# Altium PCB PCB03.PcbDoc
Units mm, origin at the board's own origin, x right, y up, seen from the top; angles counter-clockwise.
Board outline 100 x 100 mm, 4 copper layers (L1, L2, L3, L4), stack 1.571 mm thick; 160 components, 50 nets, 320 pads, 486 vias.
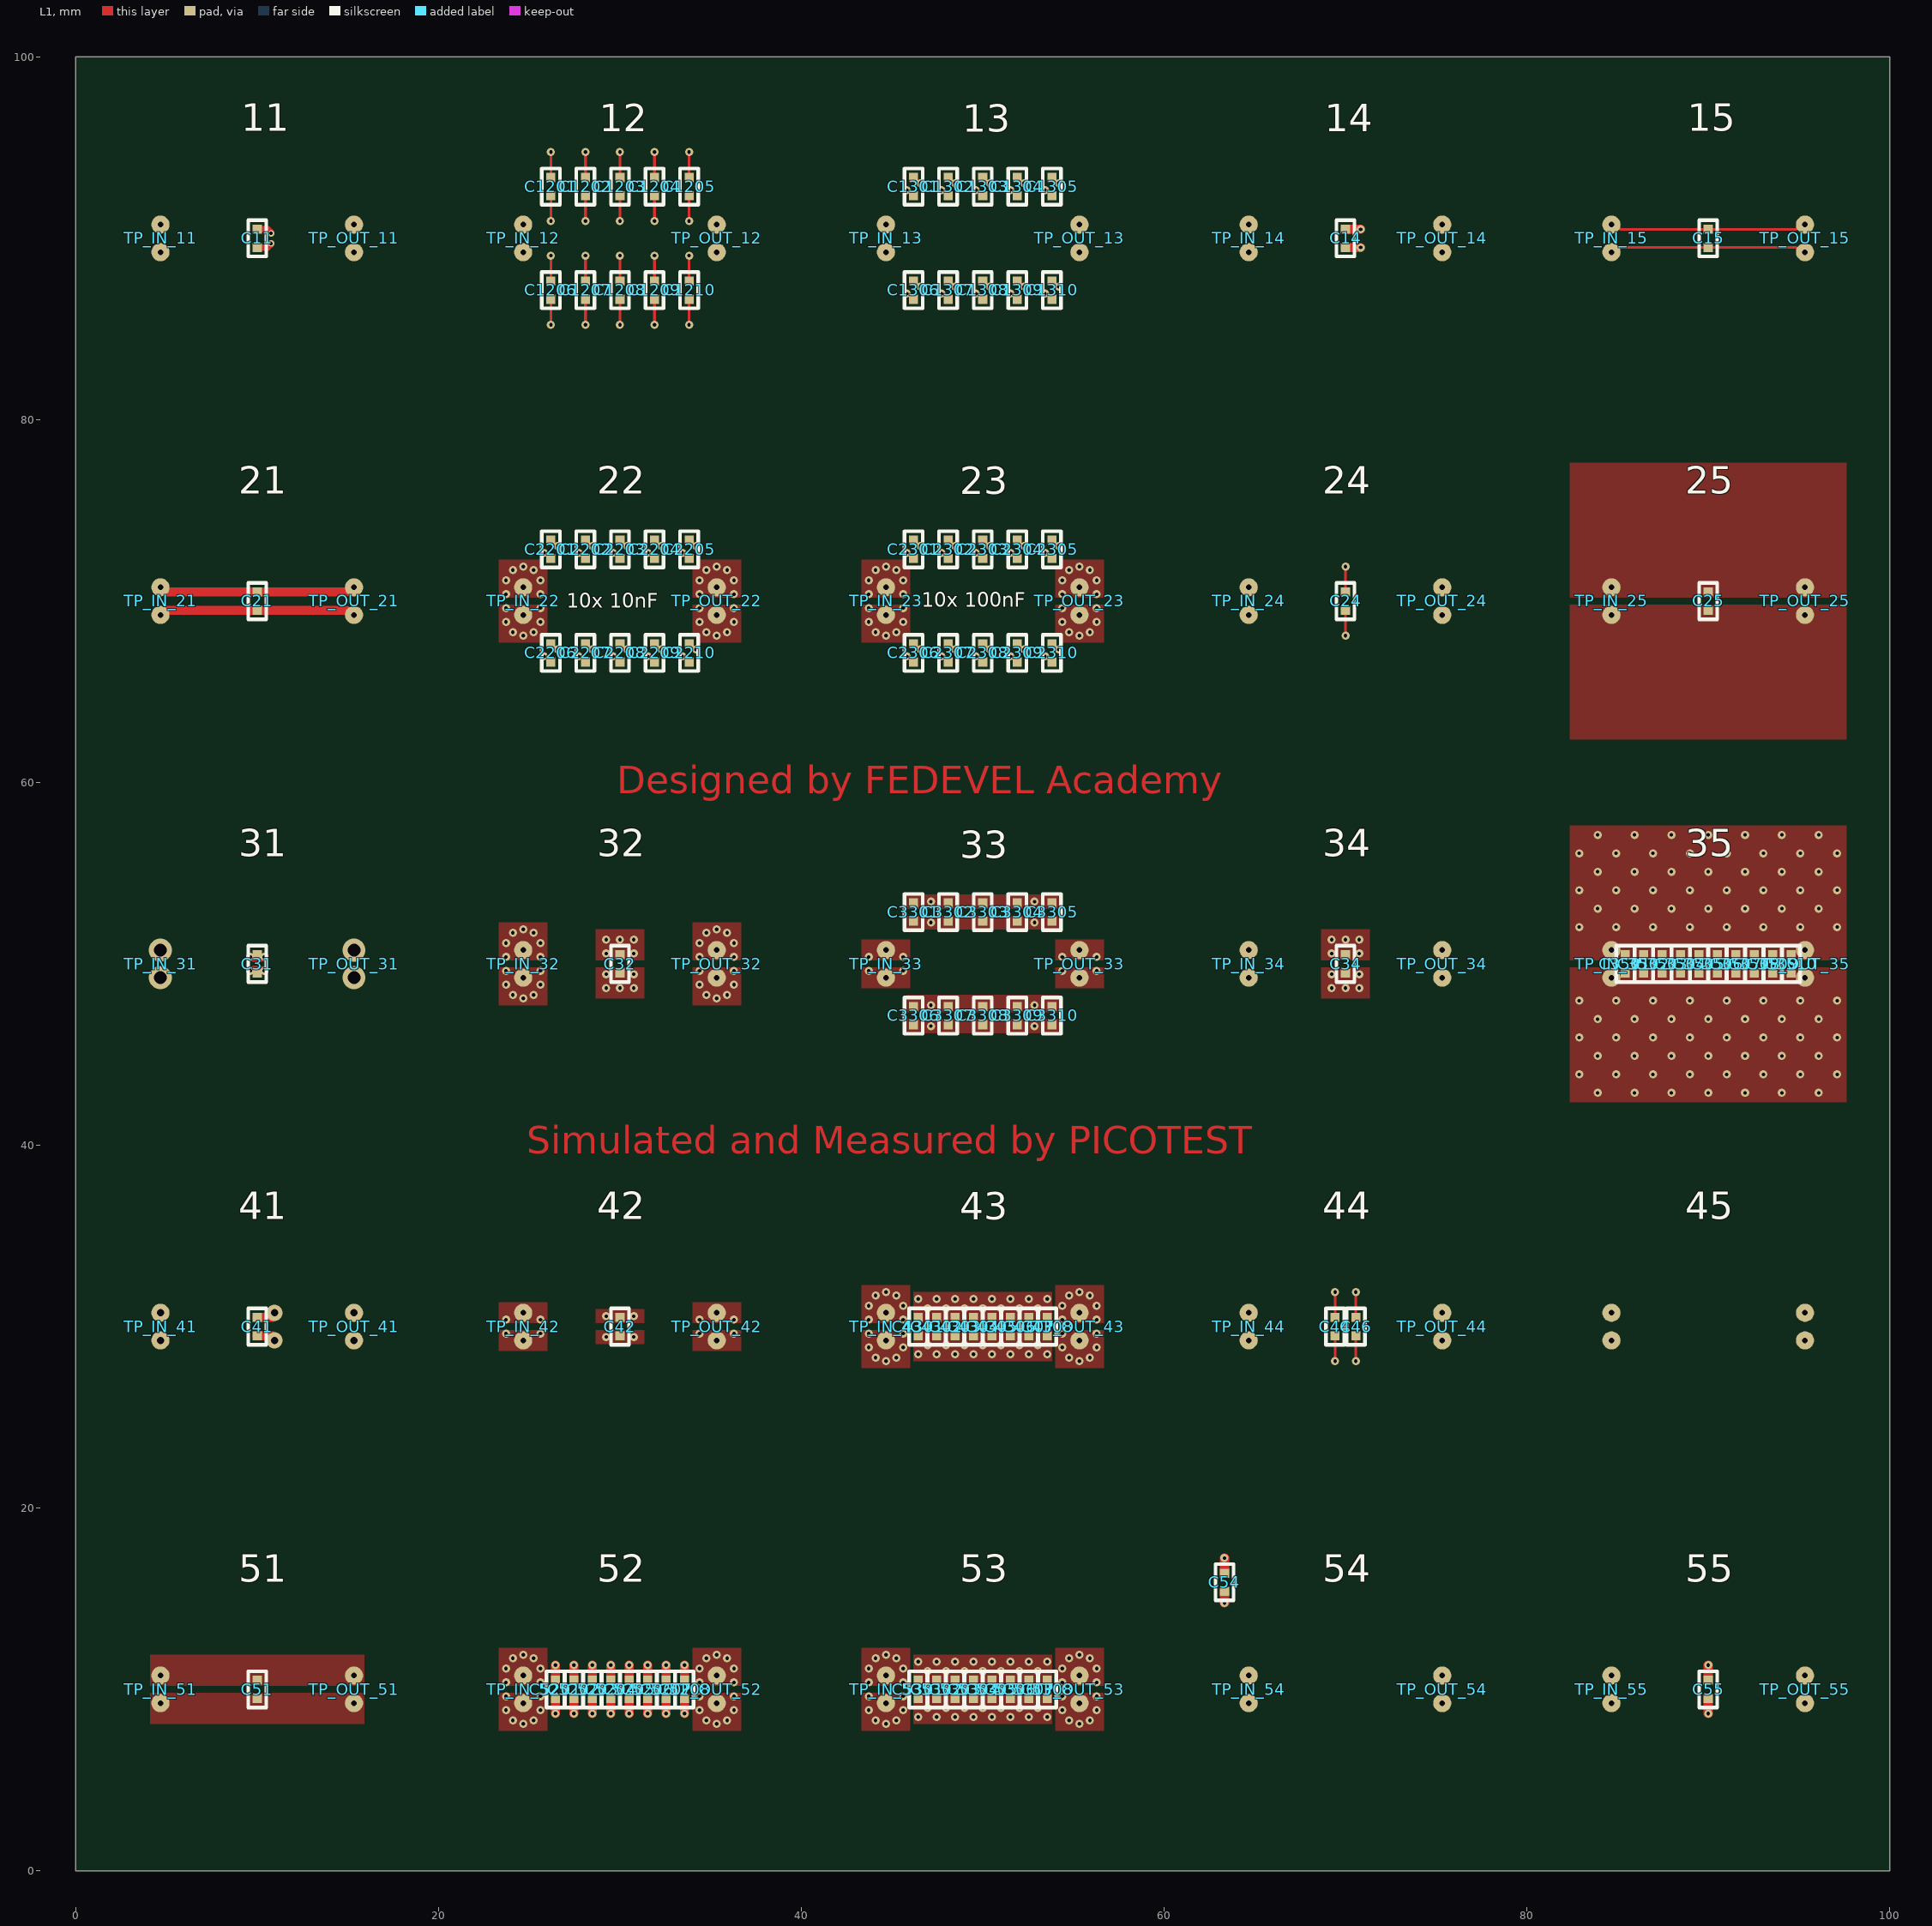
[diagram p0: L1 view]
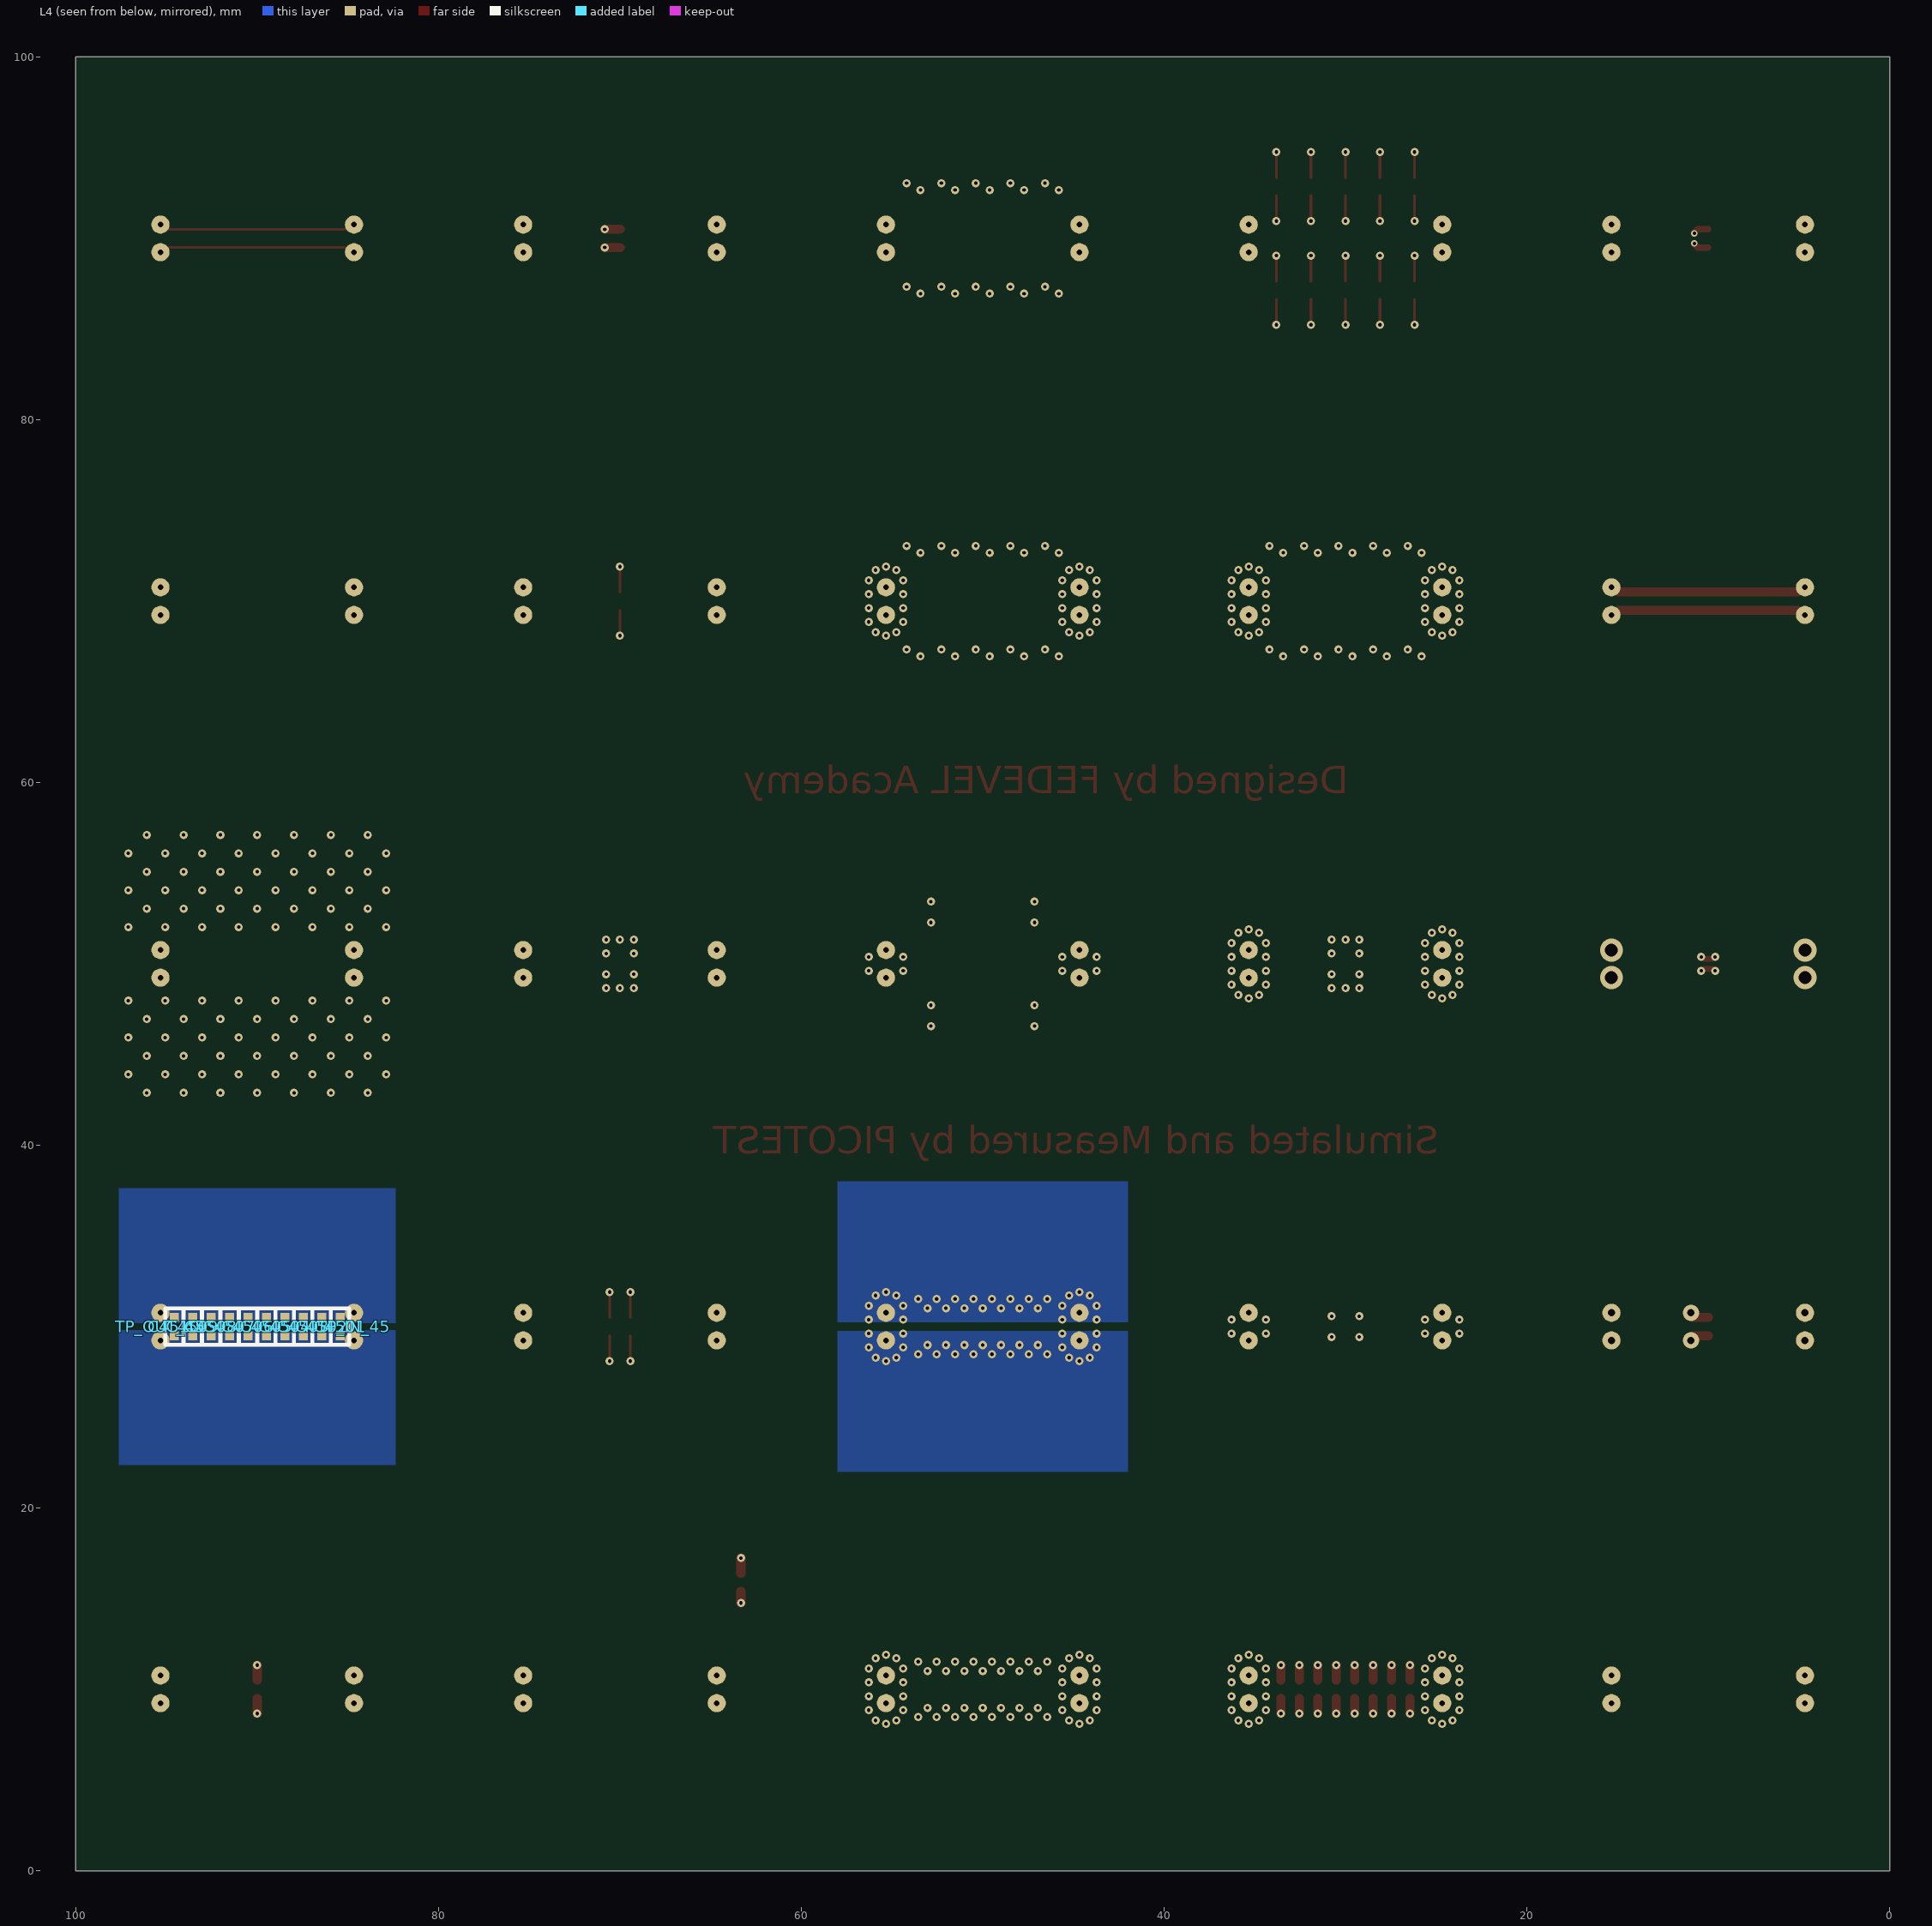
[diagram p1: L4 view, seen from below]
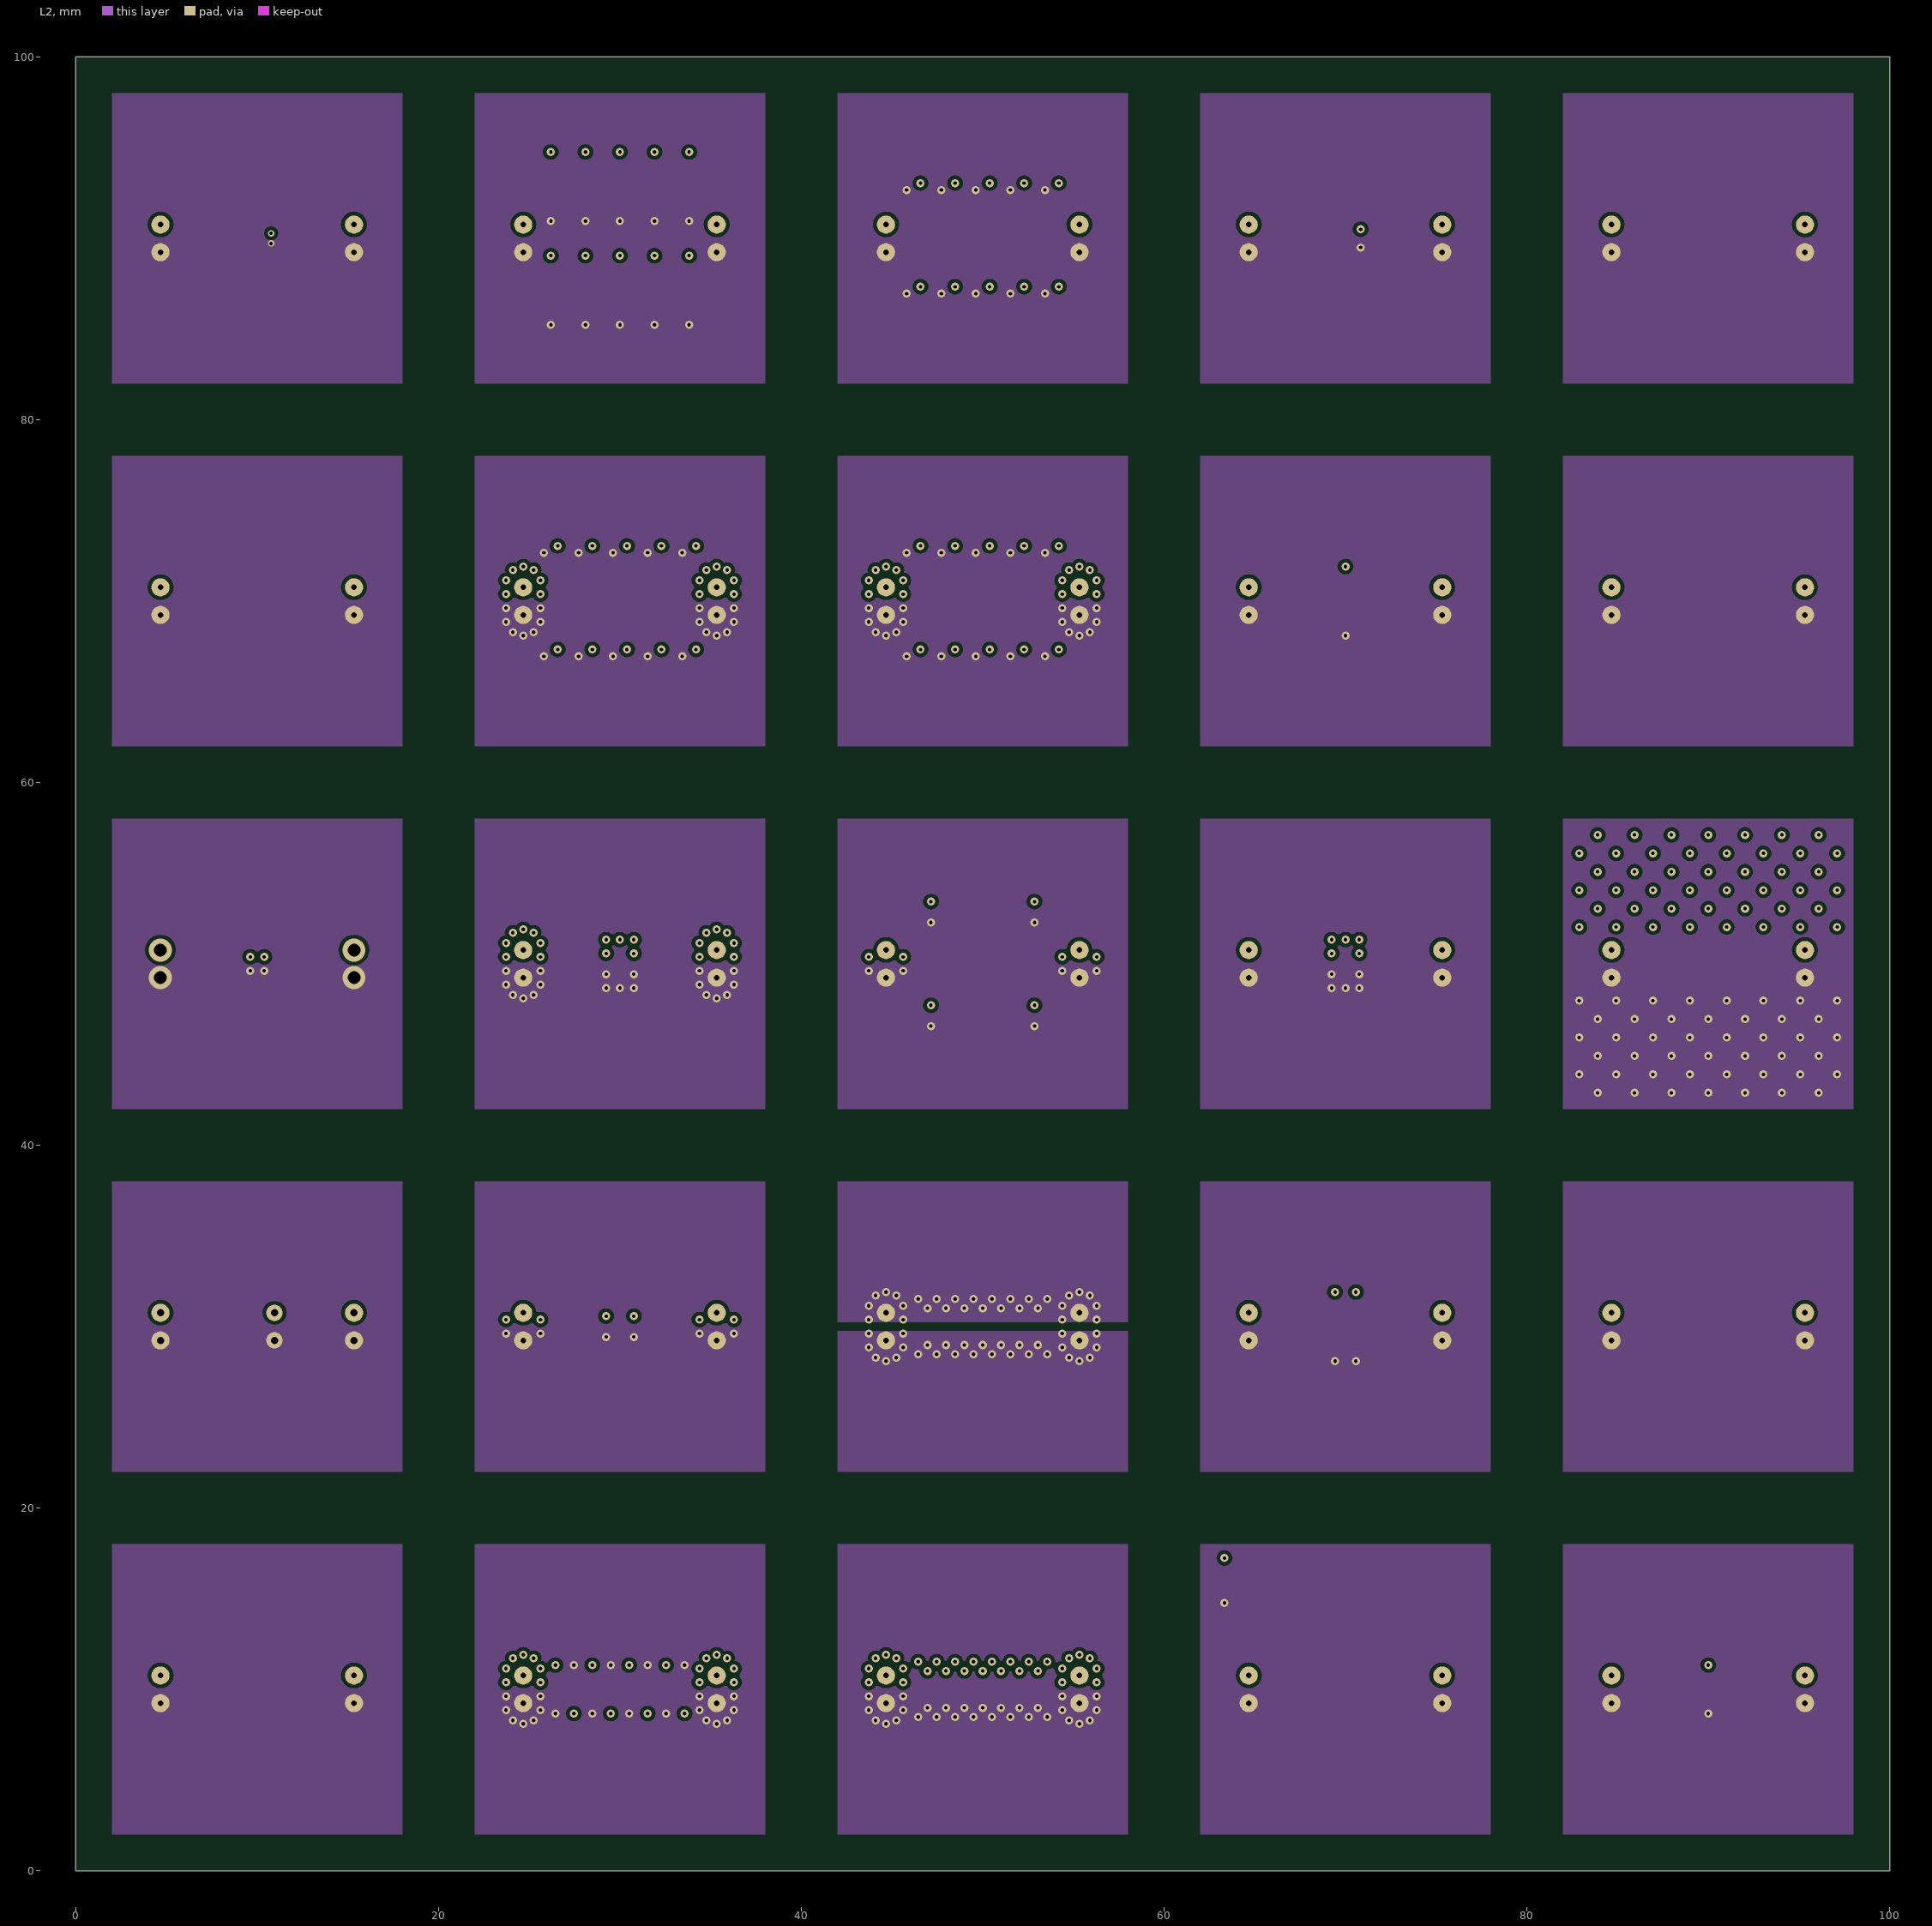
[diagram p2: L2]
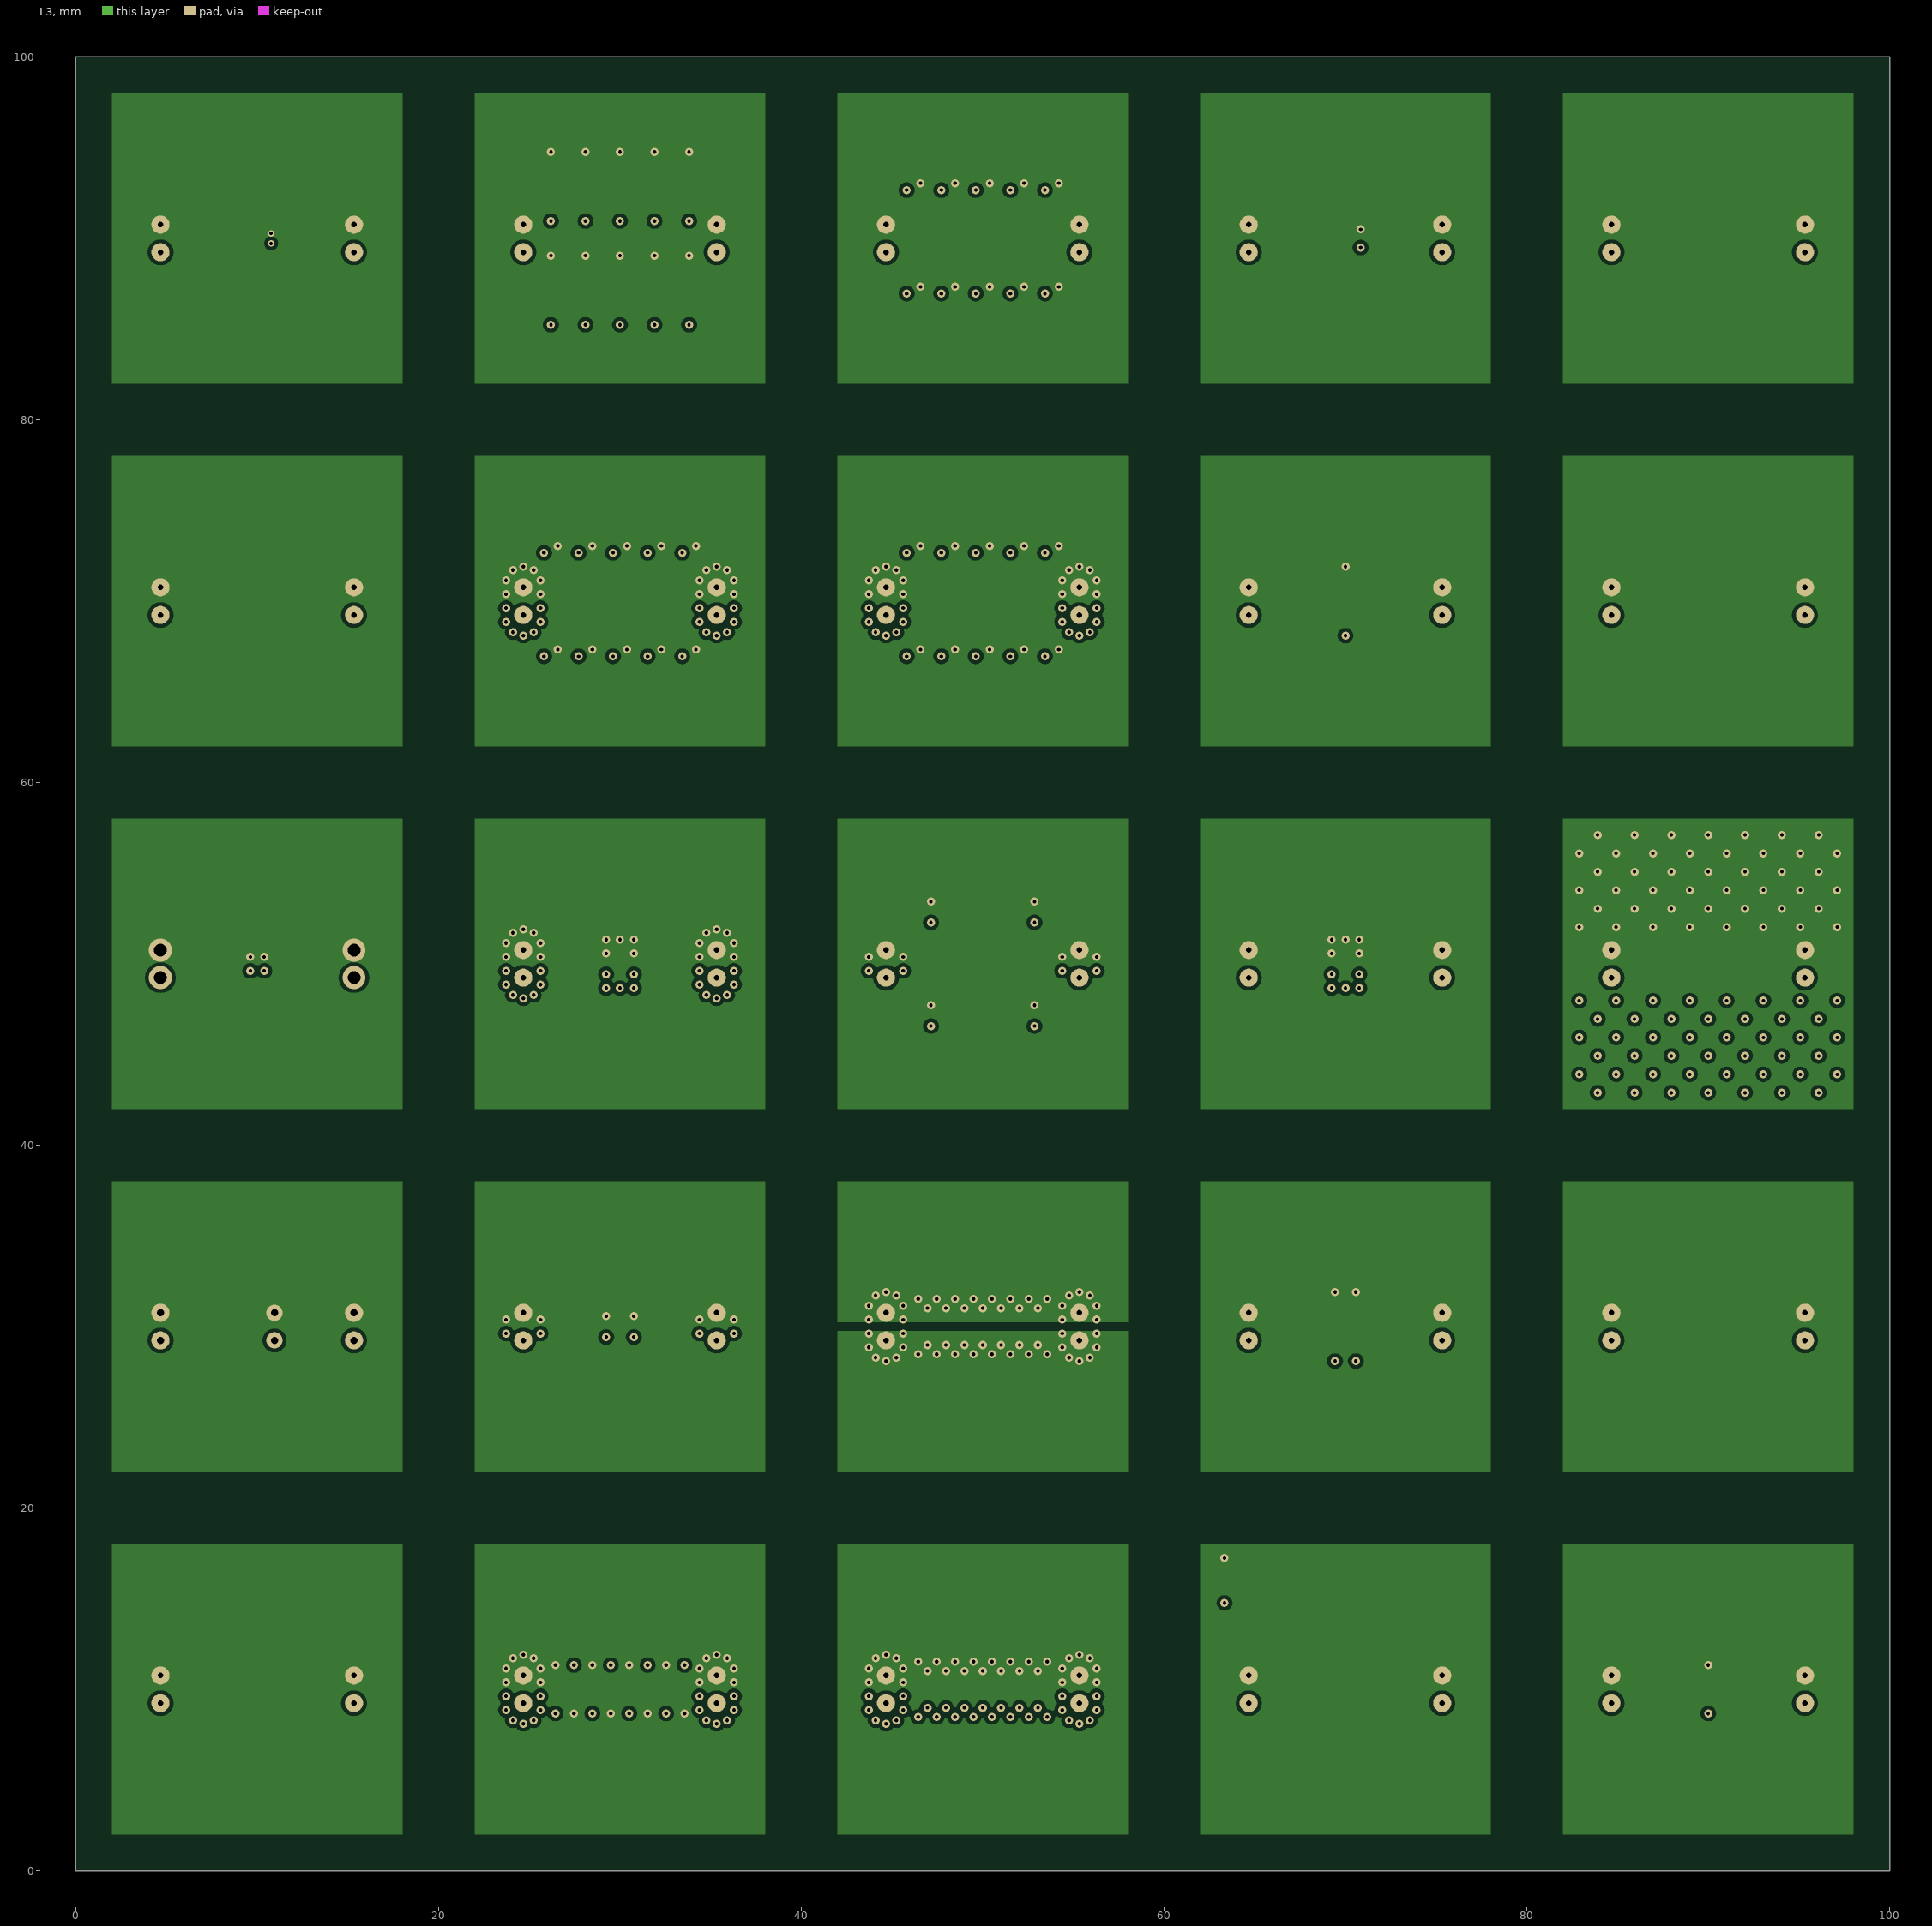
[diagram p3: L3]
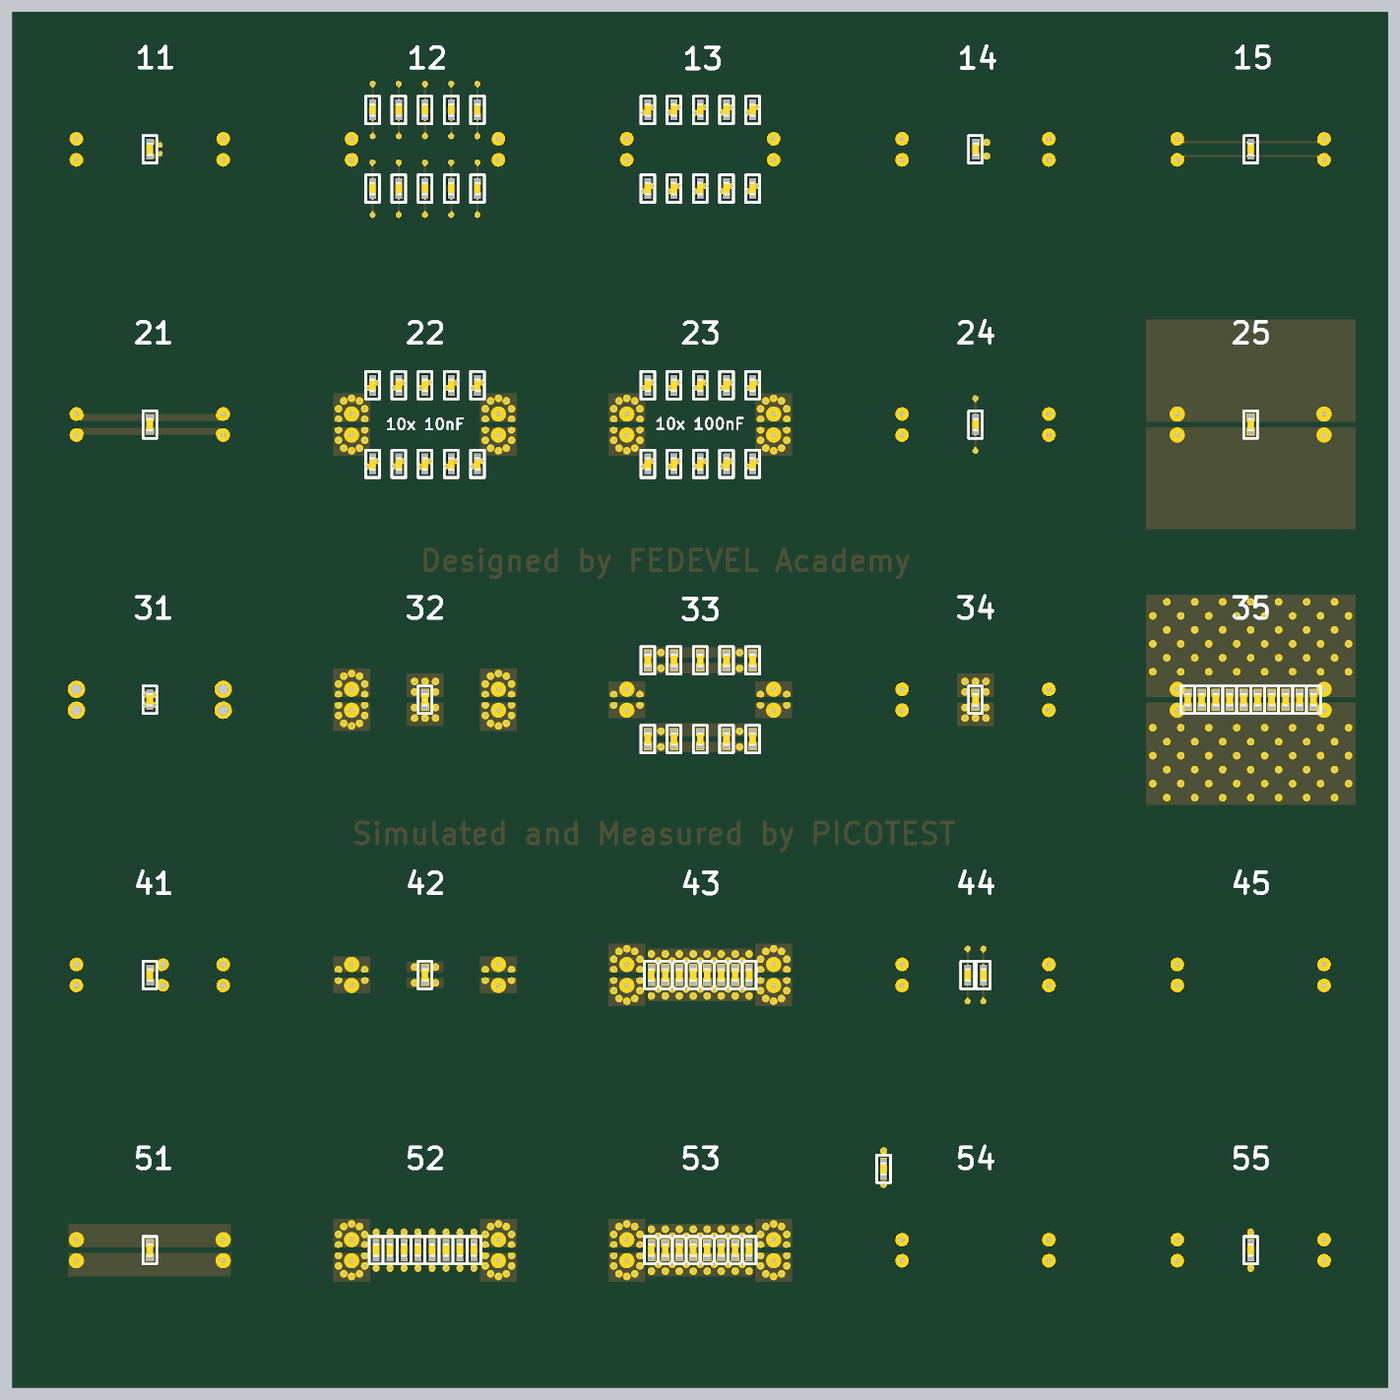
[diagram p4: 3D render of the assembled board from above, using the file's embedded part models]
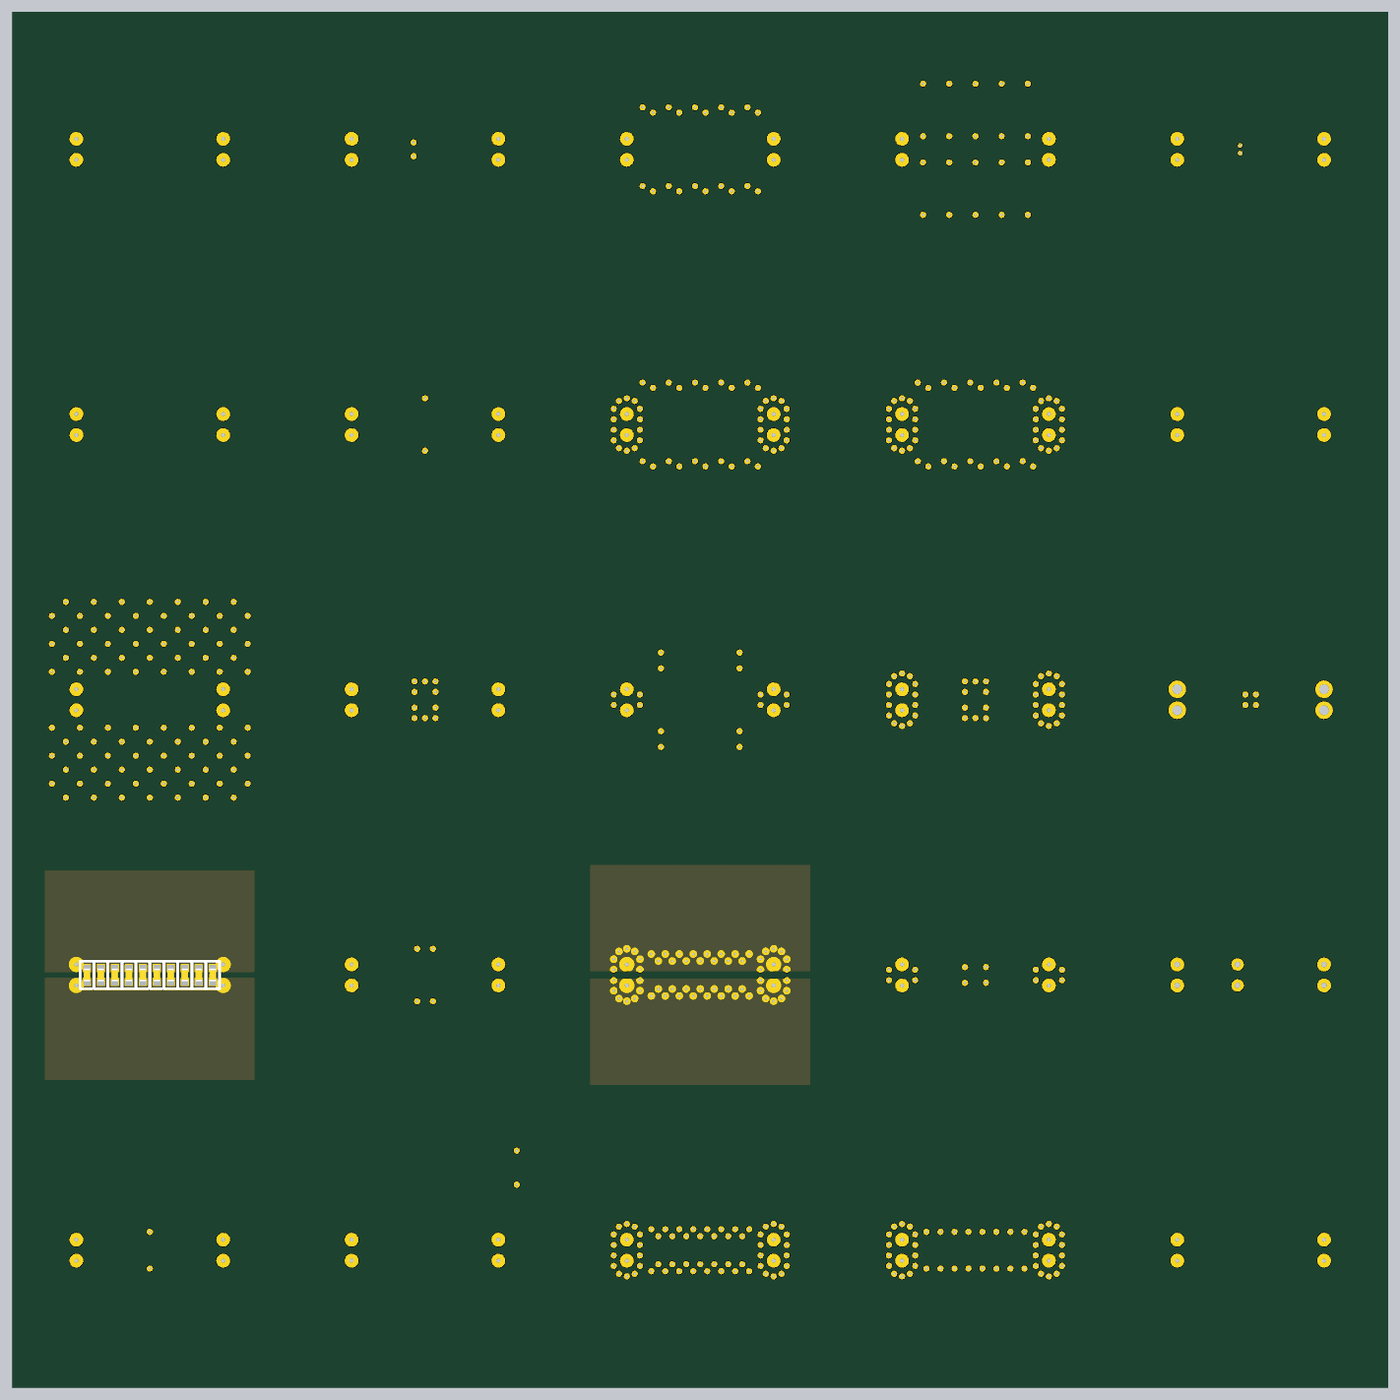
[diagram p5: 3D render of the assembled board from below, using the file's embedded part models]

## Layer stack, top to bottom
Top Solder: solder mask 0.0127, Solder Resist, Dk 3.8
L1: signal copper 0.0356
Dielectric 2: prepreg 0.1, 2313, Dk 4.05
L2: signal copper 0.0175
Dielectric 1: dielectric 1.265, FR-4, Dk 4.8
L3: signal copper 0.0175
Dielectric 3: prepreg 0.1, 2313, Dk 4.05
L4: signal copper 0.0356
Bottom Solder: solder mask 0.0127, Solder Resist, Dk 3.8

## Board outline
0,0 100,0 100,100 0,100

## Design rules (kind name [scope] priority, off if disabled: settings)
Clearance [All] p1: gap=0.2 ignorepadtopadclearanceinfootprint=FALSE
HoleSize [All] p1: absolutevalues=TRUE maxlimit=6.35 minlimit=0.2 maxpercent=80.000 minpercent=20.000
MinimumSolderMaskSliver [All] p1: minsoldermaskwidth=0.2
PolygonConnect [All] p1: connectstyle=Direct reliefconductorwidth=0.254 reliefentries=4 polygonreliefangle="90 Angle" airgapwidth=0.254
RoutingVias [All] p1: holewidth=0.3 width=0.6 viastyle="Through Hole" minholewidth=0.2 minwidth=0.45 maxholewidth=6.35 maxwidth=10
SolderMaskExpansion [All] p1: expansion=0.05 istentingtop=FALSE
Width [All] p1: maxlimit=10 minlimit=0.15 preferedwidth=0.15
28 further rules are at their usual default settings.

## Components (designator, comment, footprint, x,y, rotation, side; value= is the part's Value field where it differs from the comment)
C11 "C0402" C0402 10,90 r270 top
C14 "C0402" C0402 70,90 r270 top
C15 "C0402" C0402 90,90 r270 top
C21 "C0402" C0402 10,70 r270 top
C24 "C0402" C0402 70,70 r270 top
C25 "C0402" C0402 90,70 r270 top
C31 "C0402" C0402 10,50 r270 top
C32 "C0402" C0402 30,50 r270 top
C34 "C0402" C0402 70,50 r270 top
C41 "C0402" C0402 10,30 r270 top
C42 "C0402" C0402 30,30 r270 top
C44 "C0402" C0402 69.428,30 r270 top
C46 "C0402" C0402 70.571,30 r270 top
C51 "C0402" C0402 10,10 r270 top
C54 "C0402" C0402 63.332,15.906 r270 top
C55 "C0402" C0402 90,10 r270 top
C1201 "C0402" C0402 26.19,92.858 r270 top
C1202 "C0402" C0402 28.095,92.858 r270 top
C1203 "C0402" C0402 30,92.858 r270 top
C1204 "C0402" C0402 31.905,92.858 r270 top
C1205 "C0402" C0402 33.81,92.858 r270 top
C1206 "C0402" C0402 26.19,87.143 r270 top
C1207 "C0402" C0402 28.095,87.143 r270 top
C1208 "C0402" C0402 30,87.143 r270 top
C1209 "C0402" C0402 31.905,87.143 r270 top
C1210 "C0402" C0402 33.81,87.143 r270 top
C1301 "C0402" C0402 46.19,92.858 r270 top
C1302 "C0402" C0402 48.095,92.858 r270 top
C1303 "C0402" C0402 50,92.858 r270 top
C1304 "C0402" C0402 51.905,92.858 r270 top
C1305 "C0402" C0402 53.81,92.858 r270 top
C1306 "C0402" C0402 46.19,87.143 r270 top
C1307 "C0402" C0402 48.095,87.143 r270 top
C1308 "C0402" C0402 50,87.143 r270 top
C1309 "C0402" C0402 51.905,87.143 r270 top
C1310 "C0402" C0402 53.81,87.143 r270 top
C2201 "C0402-10n" C0402 26.19,72.857 r270 top
C2202 "C0402-10n" C0402 28.095,72.857 r270 top
C2203 "C0402-10n" C0402 30,72.857 r270 top
C2204 "C0402-10n" C0402 31.905,72.857 r270 top
C2205 "C0402-10n" C0402 33.81,72.857 r270 top
C2206 "C0402-10n" C0402 26.19,67.142 r270 top
C2207 "C0402-10n" C0402 28.095,67.142 r270 top
C2208 "C0402-10n" C0402 30,67.142 r270 top
C2209 "C0402-10n" C0402 31.905,67.142 r270 top
C2210 "C0402-10n" C0402 33.81,67.142 r270 top
C2301 "C0402" C0402 46.19,72.857 r270 top
C2302 "C0402" C0402 48.095,72.857 r270 top
C2303 "C0402" C0402 50,72.857 r270 top
C2304 "C0402" C0402 51.905,72.857 r270 top
C2305 "C0402" C0402 53.81,72.857 r270 top
C2306 "C0402" C0402 46.19,67.142 r270 top
C2307 "C0402" C0402 48.095,67.142 r270 top
C2308 "C0402" C0402 50,67.142 r270 top
C2309 "C0402" C0402 51.905,67.142 r270 top
C2310 "C0402" C0402 53.81,67.142 r270 top
C3301 "C0402" C0402 46.19,52.857 r270 top
C3302 "C0402" C0402 48.095,52.857 r270 top
C3303 "C0402" C0402 50,52.857 r270 top
C3304 "C0402" C0402 51.905,52.857 r270 top
C3305 "C0402" C0402 53.81,52.857 r270 top
C3306 "C0402" C0402 46.19,47.142 r270 top
C3307 "C0402" C0402 48.095,47.142 r270 top
C3308 "C0402" C0402 50,47.142 r270 top
C3309 "C0402" C0402 51.905,47.142 r270 top
C3310 "C0402" C0402 53.81,47.142 r270 top
C3501 "C0402" C0402 85.428,50 r270 top
C3502 "C0402" C0402 86.444,50 r270 top
C3503 "C0402" C0402 87.46,50 r270 top
C3504 "C0402" C0402 88.476,50 r270 top
C3505 "C0402" C0402 89.492,50 r270 top
C3506 "C0402" C0402 90.508,50 r270 top
C3507 "C0402" C0402 91.524,50 r270 top
C3508 "C0402" C0402 92.54,50 r270 top
C3509 "C0402" C0402 93.556,50 r270 top
C3510 "C0402" C0402 94.572,50 r270 top
C4301 "C0402" C0402 46.444,30 r270 top
C4302 "C0402" C0402 47.46,30 r270 top
C4303 "C0402" C0402 48.476,30 r270 top
C4304 "C0402" C0402 49.492,30 r270 top
C4305 "C0402" C0402 50.508,30 r270 top
C4306 "C0402" C0402 51.524,30 r270 top
C4307 "C0402" C0402 52.54,30 r270 top
C4308 "C0402" C0402 53.556,30 r270 top
C4501 "C0402" C0402 85.428,30 r270 bottom
C4502 "C0402" C0402 86.444,30 r270 bottom
C4503 "C0402" C0402 87.46,30 r270 bottom
C4504 "C0402" C0402 88.476,30 r270 bottom
C4505 "C0402" C0402 89.492,30 r270 bottom
C4506 "C0402" C0402 90.508,30 r270 bottom
C4507 "C0402" C0402 91.524,30 r270 bottom
C4508 "C0402" C0402 92.54,30 r270 bottom
C4509 "C0402" C0402 93.556,30 r270 bottom
C4510 "C0402" C0402 94.572,30 r270 bottom
C5201 "C0402" C0402 26.444,10 r270 top
C5202 "C0402" C0402 27.46,10 r90 top
C5203 "C0402" C0402 28.476,10 r270 top
C5204 "C0402" C0402 29.492,10 r90 top
C5205 "C0402" C0402 30.508,10 r270 top
C5206 "C0402" C0402 31.524,10 r90 top
C5207 "C0402" C0402 32.54,10 r270 top
C5208 "C0402" C0402 33.556,10 r90 top
C5301 "C0402" C0402 46.444,10 r270 top
C5302 "C0402" C0402 47.46,10 r270 top
C5303 "C0402" C0402 48.476,10 r270 top
C5304 "C0402" C0402 49.492,10 r270 top
C5305 "C0402" C0402 50.508,10 r270 top
C5306 "C0402" C0402 51.524,10 r270 top
C5307 "C0402" C0402 52.54,10 r270 top
C5308 "C0402" C0402 53.556,10 r270 top
TP_IN_11 "TH-TH" TP_TH_TH#1 4.666,90 r0 top
TP_IN_12 "TH-TH" TP_TH_TH#1 24.666,90 r0 top
TP_IN_13 "TH-TH" TP_TH_TH#1 44.666,90 r0 top
TP_IN_14 "TH-TH" TP_TH_TH#1 64.666,90 r0 top
TP_IN_15 "TH-TH" TP_TH_TH#1 84.666,90 r0 top
TP_IN_21 "TH-TH" TP_TH_TH#1 4.666,70 r0 top
TP_IN_22 "TH-TH" TP_TH_TH#1 24.666,70 r0 top
TP_IN_23 "TH-TH" TP_TH_TH#1 44.666,70 r0 top
TP_IN_24 "TH-TH" TP_TH_TH#1 64.666,70 r0 top
TP_IN_25 "TH-TH" TP_TH_TH#1 84.666,70 r0 top
TP_IN_31 "TH-TH" TP_TH_TH#1 4.666,50 r0 top
TP_IN_32 "TH-TH" TP_TH_TH#1 24.666,50 r0 top
TP_IN_33 "TH-TH" TP_TH_TH#1 44.666,50 r0 top
TP_IN_34 "TH-TH" TP_TH_TH#1 64.666,50 r0 top
TP_IN_35 "TH-TH" TP_TH_TH#1 84.666,50 r0 top
TP_IN_41 "TH-TH" TP_TH_TH#2 4.666,30 r0 top
TP_IN_42 "TH-TH" TP_TH_TH#1 24.666,30 r0 top
TP_IN_43 "TH-TH" TP_TH_TH#1 44.666,30 r0 top
TP_IN_44 "TH-TH" TP_TH_TH#1 64.666,30 r0 top
TP_IN_45 "TH-TH" TP_TH_TH#1 84.666,30 r180 bottom
TP_IN_51 "TH-TH" TP_TH_TH#1 4.666,10 r0 top
TP_IN_52 "TH-TH" TP_TH_TH#1 24.666,10 r0 top
TP_IN_53 "TH-TH" TP_TH_TH#1 44.666,10 r0 top
TP_IN_54 "TH-TH" TP_TH_TH#1 64.666,10 r0 top
TP_IN_55 "TH-TH" TP_TH_TH#1 84.666,10 r0 top
TP_OUT_11 "TH-TH" TP_TH_TH#1 15.334,90 r0 top
TP_OUT_12 "TH-TH" TP_TH_TH#1 35.334,90 r0 top
TP_OUT_13 "TH-TH" TP_TH_TH#1 55.334,90 r0 top
TP_OUT_14 "TH-TH" TP_TH_TH#1 75.334,90 r0 top
TP_OUT_15 "TH-TH" TP_TH_TH#1 95.334,90 r0 top
TP_OUT_21 "TH-TH" TP_TH_TH#1 15.334,70 r0 top
TP_OUT_22 "TH-TH" TP_TH_TH#1 35.334,70 r0 top
TP_OUT_23 "TH-TH" TP_TH_TH#1 55.334,70 r0 top
TP_OUT_24 "TH-TH" TP_TH_TH#1 75.334,70 r0 top
TP_OUT_25 "TH-TH" TP_TH_TH#1 95.334,70 r0 top
TP_OUT_31 "TH-TH" TP_TH_TH#1 15.334,50 r0 top
TP_OUT_32 "TH-TH" TP_TH_TH#1 35.334,50 r0 top
TP_OUT_33 "TH-TH" TP_TH_TH#1 55.334,50 r0 top
TP_OUT_34 "TH-TH" TP_TH_TH#1 75.334,50 r0 top
TP_OUT_35 "TH-TH" TP_TH_TH#1 95.334,50 r0 top
TP_OUT_41 "TH-TH" TP_TH_TH#2 15.334,30 r0 top
TP_OUT_42 "TH-TH" TP_TH_TH#1 35.334,30 r0 top
TP_OUT_43 "TH-TH" TP_TH_TH#1 55.334,30 r0 top
TP_OUT_44 "TH-TH" TP_TH_TH#1 75.334,30 r0 top
TP_OUT_45 "TH-TH" TP_TH_TH#1 95.334,30 r180 bottom
TP_OUT_51 "TH-TH" TP_TH_TH#1 15.334,10 r0 top
TP_OUT_52 "TH-TH" TP_TH_TH#1 35.334,10 r0 top
TP_OUT_53 "TH-TH" TP_TH_TH#1 55.334,10 r0 top
TP_OUT_54 "TH-TH" TP_TH_TH#1 75.334,10 r0 top
TP_OUT_55 "TH-TH" TP_TH_TH#1 95.334,10 r0 top

## Footprints (in the part's own frame and the unit in brackets; to place one, negate y for a bottom-side part, rotate by r counter-clockwise, add the part's x,y. Pads: shape width x height; smd on the part's side, far side on the other; paste and mask are expansions set on the pad)
C0402 [mm]
  rect 0.5x0.5 smd: 1(-0.5,0) 2(0.5,0)
  silkscreen extent -1,-0.5 1,0.5, body extent -0.5,-0.25 0.5,0.25, height 0.56
TP_TH_TH#1 [mm]
  round 1 hole 0.3: 1(0,0.762) 2(0,-0.762)
TP_TH_TH#2 [mm]
  round 1 hole 0.4: 1(0,0.762) 2(0,-0.762)

## Part data
C11 C14 C15 C21 C24 C25 C31 C32 C34 C41 C42 C44 C46 C51 C54 C55 C1201 C1202 C1203 C1204 C1205 C1206 C1207 C1208 C1209 C1210 C1301 C1302 C1303 C1304 C1305 C1306 C1307 C1308 C1309 C1310 C2201 C2202 C2203 C2204 C2205 C2206 C2207 C2208 C2209 C2210 C2301 C2302 C2303 C2304 C2305 C2306 C2307 C2308 C2309 C2310 C3301 C3302 C3303 C3304 C3305 C3306 C3307 C3308 C3309 C3310 C3501 C3502 C3503 C3504 C3505 C3506 C3507 C3508 C3509 C3510 C4301 C4302 C4303 C4304 C4305 C4306 C4307 C4308 C4501 C4502 C4503 C4504 C4505 C4506 C4507 C4508 C4509 C4510 C5201 C5202 C5203 C5204 C5205 C5206 C5207 C5208 C5301 C5302 C5303 C5304 C5305 C5306 C5307 C5308: library part CAP0402
TP_IN_11 TP_IN_12 TP_IN_13 TP_IN_14 TP_IN_15 TP_IN_21 TP_IN_22 TP_IN_23 TP_IN_24 TP_IN_25 TP_IN_31 TP_IN_32 TP_IN_33 TP_IN_34 TP_IN_35 TP_IN_41 TP_IN_42 TP_IN_43 TP_IN_44 TP_IN_45 TP_IN_51 TP_IN_52 TP_IN_53 TP_IN_54 TP_IN_55 TP_OUT_11 TP_OUT_12 TP_OUT_13 TP_OUT_14 TP_OUT_15 TP_OUT_21 TP_OUT_22 TP_OUT_23 TP_OUT_24 TP_OUT_25 TP_OUT_31 TP_OUT_32 TP_OUT_33 TP_OUT_34 TP_OUT_35 TP_OUT_41 TP_OUT_42 TP_OUT_43 TP_OUT_44 TP_OUT_45 TP_OUT_51 TP_OUT_52 TP_OUT_53 TP_OUT_54 TP_OUT_55: library part TP_TH_TH, "Testpoints TH - TH 1mm/0.3mm"

## Via types
v1: diameter 0.45, hole 0.2, L1 to L4, 478 vias
v2: diameter 1.27, hole 0.711, L1 to L4, 4 vias
v3: diameter 0.35, hole 0.2, L1 to L4, 2 vias
v4: diameter 0.9, hole 0.4, L1 to L4, 2 vias

## Nets (pads, with @x,y where several pads share a name; then routed paths per layer and width w, separated by ;. In a path a pad name is that pad's centre, name@x,y a point inside that pad or via, vN(x,y) a via of type N, cw(c..) or ccw(c..) an arc to the next point about the centre after c; other vN are vias at no path point)
+VCC11: C11.1 TP_IN_11.1 TP_OUT_11.1 | length 0.9
  L1 w0.35: C11.1 10.592,90.5 10.762,90.33 v3(10.762,90.279)
+VCC12: C1201.1 C1202.1 C1203.1 C1204.1 C1205.1 C1206.1 C1207.1 C1208.1 C1209.1 C1210.1 TP_IN_12.1 TP_OUT_12.1 | length 14.1
  L1 w0.15: C1206.1 v1(26.19,89.048) ; C1201.1 v1(26.19,94.763) ; C1207.1 v1(28.095,89.048) ; C1202.1 v1(28.095,94.763) ; C1208.1 v1(30,89.048) ; C1203.1 v1(30,94.763) ; C1209.1 v1(31.905,89.048) ; C1204.1 v1(31.905,94.763) ; C1210.1 v1(33.81,89.048) ; C1205.1 v1(33.81,94.763)
+VCC13: C1301.1 C1302.1 C1303.1 C1304.1 C1305.1 C1306.1 C1307.1 C1308.1 C1309.1 C1310.1 TP_IN_13.1 TP_OUT_13.1
  other v1: 46.571,87.333 48.476,87.333 50.381,87.333 52.286,87.333 54.191,87.333 46.571,93.048 48.476,93.048 50.381,93.048 52.286,93.048 54.191,93.048
+VCC14: C14.1 TP_IN_14.1 TP_OUT_14.1 | length 0.8
  L1 w0.5: C14.1 v1(70.834,90.5)
+VCC15: C15.1 TP_IN_15.1 TP_OUT_15.1 | length 10.9
  L1 w0.15: TP_IN_15.1 84.896,90.762 85.158,90.5 C15.1 94.842,90.5 95.104,90.762 TP_OUT_15.1
+VCC21: C21.1 TP_IN_21.1 TP_OUT_21.1 | length 10.9
  L1 w0.5: TP_IN_21.1 4.801,70.762 5.063,70.5 C21.1 14.937,70.5 15.199,70.762 TP_OUT_21.1
+VCC22: C2201.1 C2202.1 C2203.1 C2204.1 C2205.1 C2206.1 C2207.1 C2208.1 C2209.1 C2210.1 TP_IN_22.1 TP_OUT_22.1
  other v1: 26.571,67.333 28.476,67.333 30.381,67.333 32.286,67.333 34.191,67.333 23.714,70.381 25.619,70.381 34.382,70.381 36.287,70.381 23.714,71.143 25.619,71.143 34.382,71.143 36.287,71.143 24.095,71.714 25.238,71.714 34.763,71.714 35.906,71.714 24.666,71.905 35.334,71.905 26.571,73.048 28.476,73.048 30.381,73.048 32.286,73.048 34.191,73.048
+VCC23: C2301.1 C2302.1 C2303.1 C2304.1 C2305.1 C2306.1 C2307.1 C2308.1 C2309.1 C2310.1 TP_IN_23.1 TP_OUT_23.1
  other v1: 46.571,67.333 48.476,67.333 50.381,67.333 52.286,67.333 54.191,67.333 43.713,70.381 45.618,70.381 54.381,70.381 56.286,70.381 43.713,71.143 45.618,71.143 54.381,71.143 56.286,71.143 44.094,71.714 45.237,71.714 54.762,71.714 55.905,71.714 44.666,71.905 55.334,71.905 46.571,73.048 48.476,73.048 50.381,73.048 52.286,73.048 54.191,73.048
+VCC24: C24.1 TP_IN_24.1 TP_OUT_24.1 | length 1.4
  L1 w0.15: C24.1 v1(70,71.905)
+VCC25: C25.1 TP_IN_25.1 TP_OUT_25.1
+VCC31: C31.1 TP_IN_31.1 TP_OUT_31.1 | length 0.9
  L1 w0.3: v1(9.619,50.381) 9.66,50.381 9.776,50.265 10,50.265 10.224,50.265 10.34,50.381 v1(10.381,50.381)
  other v2: 4.666,50.762 15.334,50.762
+VCC32: C32.1 TP_IN_32.1 TP_OUT_32.1
  other v1: 23.714,50.381 25.619,50.381 34.382,50.381 36.287,50.381 29.238,50.571 30.762,50.571 23.714,51.143 25.619,51.143 34.382,51.143 36.287,51.143 29.238,51.333 30,51.333 30.762,51.333 24.095,51.714 25.238,51.714 34.763,51.714 35.906,51.714 24.666,51.905 35.334,51.905
+VCC33: C3301.1 C3302.1 C3303.1 C3304.1 C3305.1 C3306.1 C3307.1 C3308.1 C3309.1 C3310.1 TP_IN_33.1 TP_OUT_33.1
  other v1: 47.142,47.714 52.857,47.714 43.713,50.381 45.618,50.381 54.381,50.381 56.286,50.381 47.142,53.429 52.857,53.429
+VCC34: C34.1 TP_IN_34.1 TP_OUT_34.1
  other v1: 69.238,50.571 70.762,50.571 69.238,51.333 70,51.333 70.762,51.333
+VCC35: C3501.1 C3502.1 C3503.1 C3504.1 C3505.1 C3506.1 C3507.1 C3508.1 C3509.1 C3510.1 TP_IN_35.1 TP_OUT_35.1
  other v1: 82.888,52.032 84.92,52.032 86.952,52.032 88.984,52.032 91.016,52.032 93.048,52.032 95.08,52.032 97.112,52.032 83.904,53.048 85.936,53.048 87.968,53.048 90,53.048 92.032,53.048 94.064,53.048 96.096,53.048 82.888,54.064 84.92,54.064 86.952,54.064 88.984,54.064 91.016,54.064 93.048,54.064 95.08,54.064 97.112,54.064 83.904,55.08 85.936,55.08 87.968,55.08 90,55.08 92.032,55.08 94.064,55.08 96.096,55.08 82.888,56.096 84.92,56.096 86.952,56.096 88.984,56.096 91.016,56.096 93.048,56.096 95.08,56.096 97.112,56.096 83.904,57.112 85.936,57.112 87.968,57.112 90,57.112 92.032,57.112 94.064,57.112 96.096,57.112
+VCC41: C41.1 TP_IN_41.1 TP_OUT_41.1 | length 1.3
  L1 w0.5: C41.1 10.582,30.5 ; v4@10.834,30.5 10.582,30.5 ; v4(10.953,30.762) 10.844,30.762 10.582,30.5
+VCC42: C42.1 TP_IN_42.1 TP_OUT_42.1
  other v1: 23.714,30.381 25.619,30.381 34.382,30.381 36.287,30.381 29.238,30.572 30.762,30.572
+VCC43: C4301.1 C4302.1 C4303.1 C4304.1 C4305.1 C4306.1 C4307.1 C4308.1 TP_IN_43.1 TP_OUT_43.1
  other v1: 43.713,30.381 45.618,30.381 54.381,30.381 56.286,30.381 46.952,31.016 47.968,31.016 48.984,31.016 50,31.016 51.016,31.016 52.032,31.016 53.048,31.016 43.713,31.143 45.618,31.143 54.381,31.143 56.286,31.143 46.444,31.524 47.46,31.524 48.476,31.524 49.492,31.524 50.508,31.524 51.524,31.524 52.54,31.524 53.556,31.524 44.094,31.715 45.237,31.715 54.762,31.715 55.905,31.715 44.666,31.905 55.334,31.905
+VCC44: C44.1 C46.1 TP_IN_44.1 TP_OUT_44.1 | length 2.8
  L1 w0.15: C44.1 v1(69.428,31.905) ; C46.1 v1(70.571,31.905)
+VCC45: C4501.1 C4502.1 C4503.1 C4504.1 C4505.1 C4506.1 C4507.1 C4508.1 C4509.1 C4510.1 TP_IN_45.1 TP_OUT_45.1
+VCC51: C51.1 TP_IN_51.1 TP_OUT_51.1
+VCC52: C5201.1 C5202.1 C5203.1 C5204.1 C5205.1 C5206.1 C5207.1 C5208.1 TP_IN_52.1 TP_OUT_52.1 | length 6.7
  L1 w0.5: C5201.1 v1(26.444,11.334) ; v1(27.46,8.667) C5202.1 ; C5203.1 v1(28.476,11.334) ; v1(29.492,8.667) C5204.1 ; C5205.1 v1(30.508,11.334) ; v1(31.524,8.667) C5206.1 ; C5207.1 v1(32.54,11.334) ; v1(33.556,8.667) C5208.1
  other v1: 23.714,10.381 25.619,10.381 34.382,10.381 36.287,10.381 23.714,11.143 25.619,11.143 34.382,11.143 36.287,11.143 24.095,11.715 25.238,11.715 34.763,11.715 35.906,11.715 24.666,11.905 35.334,11.905
+VCC53: C5301.1 C5302.1 C5303.1 C5304.1 C5305.1 C5306.1 C5307.1 C5308.1 TP_IN_53.1 TP_OUT_53.1
  other v1: 43.713,10.381 45.618,10.381 54.381,10.381 56.286,10.381 46.952,11.016 47.968,11.016 48.984,11.016 50,11.016 51.016,11.016 52.032,11.016 53.048,11.016 43.713,11.143 45.618,11.143 54.381,11.143 56.286,11.143 46.444,11.524 47.46,11.524 48.476,11.524 49.492,11.524 50.508,11.524 51.524,11.524 52.54,11.524 53.556,11.524 44.094,11.715 45.237,11.715 54.762,11.715 55.905,11.715 44.666,11.905 55.334,11.905
+VCC54: C54.1 TP_IN_54.1 TP_OUT_54.1 | length 0.8
  L1 w0.5: C54.1 v1(63.332,17.239)
+VCC55: C55.1 TP_IN_55.1 TP_OUT_55.1 | length 0.8
  L1 w0.5: C55.1 v1(90,11.334)
GND11: C11.2 TP_IN_11.2 TP_OUT_11.2 | length 0.9
  L1 w0.35: C11.2 10.592,89.5 10.762,89.67 v3(10.762,89.721)
GND12: C1201.2 C1202.2 C1203.2 C1204.2 C1205.2 C1206.2 C1207.2 C1208.2 C1209.2 C1210.2 TP_IN_12.2 TP_OUT_12.2 | length 14.1
  L1 w0.15: v1(26.19,85.237) C1206.2 ; v1(26.19,90.952) C1201.2 ; v1(28.095,85.237) C1207.2 ; v1(28.095,90.952) C1202.2 ; v1(30,85.237) C1208.2 ; v1(30,90.952) C1203.2 ; v1(31.905,85.237) C1209.2 ; v1(31.905,90.952) C1204.2 ; v1(33.81,85.237) C1210.2 ; v1(33.81,90.952) C1205.2
GND13: C1301.2 C1302.2 C1303.2 C1304.2 C1305.2 C1306.2 C1307.2 C1308.2 C1309.2 C1310.2 TP_IN_13.2 TP_OUT_13.2
  other v1: 45.809,86.952 47.714,86.952 49.619,86.952 51.524,86.952 53.429,86.952 45.809,92.667 47.714,92.667 49.619,92.667 51.524,92.667 53.429,92.667
GND14: C14.2 TP_IN_14.2 TP_OUT_14.2 | length 0.8
  L1 w0.5: C14.2 v1(70.834,89.5)
GND15: C15.2 TP_IN_15.2 TP_OUT_15.2 | length 10.9
  L1 w0.15: TP_IN_15.2 84.896,89.238 85.158,89.5 C15.2 94.842,89.5 95.104,89.238 TP_OUT_15.2
GND21: C21.2 TP_IN_21.2 TP_OUT_21.2 | length 10.9
  L1 w0.5: TP_IN_21.2 4.801,69.238 5.063,69.5 C21.2 14.937,69.5 15.199,69.238 TP_OUT_21.2
GND22: C2201.2 C2202.2 C2203.2 C2204.2 C2205.2 C2206.2 C2207.2 C2208.2 C2209.2 C2210.2 TP_IN_22.2 TP_OUT_22.2
  other v1: 25.809,66.952 27.714,66.952 29.619,66.952 31.524,66.952 33.429,66.952 24.666,68.095 35.334,68.095 24.095,68.285 25.238,68.285 34.763,68.285 35.906,68.285 23.714,68.857 25.619,68.857 34.382,68.857 36.287,68.857 23.714,69.619 25.619,69.619 34.382,69.619 36.287,69.619 25.809,72.667 27.714,72.667 29.619,72.667 31.524,72.667 33.429,72.667
GND23: C2301.2 C2302.2 C2303.2 C2304.2 C2305.2 C2306.2 C2307.2 C2308.2 C2309.2 C2310.2 TP_IN_23.2 TP_OUT_23.2
  other v1: 45.809,66.952 47.714,66.952 49.619,66.952 51.524,66.952 53.429,66.952 44.666,68.095 55.334,68.095 44.094,68.285 45.237,68.285 54.762,68.285 55.905,68.285 43.713,68.857 45.618,68.857 54.381,68.857 56.286,68.857 43.713,69.619 45.618,69.619 54.381,69.619 56.286,69.619 45.809,72.667 47.714,72.667 49.619,72.667 51.524,72.667 53.429,72.667
GND24: C24.2 TP_IN_24.2 TP_OUT_24.2 | length 1.4
  L1 w0.15: v1(70,68.095) C24.2
GND25: C25.2 TP_IN_25.2 TP_OUT_25.2
GND31: C31.2 TP_IN_31.2 TP_OUT_31.2 | length 0.9
  L1 w0.3: v1(9.619,49.619) 9.66,49.619 9.776,49.735 10,49.735 10.224,49.735 10.34,49.619 v1(10.381,49.619)
  other v2: 4.666,49.238 15.334,49.238
GND32: C32.2 TP_IN_32.2 TP_OUT_32.2
  other v1: 24.666,48.095 35.334,48.095 24.095,48.285 25.238,48.285 34.763,48.285 35.906,48.285 29.238,48.666 30,48.666 30.762,48.666 23.714,48.857 25.619,48.857 34.382,48.857 36.287,48.857 29.238,49.428 30.762,49.428 23.714,49.619 25.619,49.619 34.382,49.619 36.287,49.619
GND33: C3301.2 C3302.2 C3303.2 C3304.2 C3305.2 C3306.2 C3307.2 C3308.2 C3309.2 C3310.2 TP_IN_33.2 TP_OUT_33.2
  other v1: 47.142,46.571 52.857,46.571 43.713,49.619 45.618,49.619 54.381,49.619 56.286,49.619 47.142,52.286 52.857,52.286
GND34: C34.2 TP_IN_34.2 TP_OUT_34.2
  other v1: 69.238,48.666 70,48.666 70.762,48.666 69.238,49.428 70.762,49.428
GND35: C3501.2 C3502.2 C3503.2 C3504.2 C3505.2 C3506.2 C3507.2 C3508.2 C3509.2 C3510.2 TP_IN_35.2 TP_OUT_35.2
  other v1: 83.904,42.888 85.936,42.888 87.968,42.888 90,42.888 92.032,42.888 94.064,42.888 96.096,42.888 82.888,43.904 84.92,43.904 86.952,43.904 88.984,43.904 91.016,43.904 93.048,43.904 95.08,43.904 97.112,43.904 83.904,44.92 85.936,44.92 87.968,44.92 90,44.92 92.032,44.92 94.064,44.92 96.096,44.92 82.888,45.936 84.92,45.936 86.952,45.936 88.984,45.936 91.016,45.936 93.048,45.936 95.08,45.936 97.112,45.936 83.904,46.952 85.936,46.952 87.968,46.952 90,46.952 92.032,46.952 94.064,46.952 96.096,46.952 82.888,47.968 84.92,47.968 86.952,47.968 88.984,47.968 91.016,47.968 93.048,47.968 95.08,47.968 97.112,47.968
GND41: C41.2 TP_IN_41.2 TP_OUT_41.2 | length 1.3
  L1 w0.5: C41.2 10.582,29.5 ; v4@10.834,29.5 10.582,29.5 ; v4(10.953,29.238) 10.844,29.238 10.582,29.5
GND42: C42.2 TP_IN_42.2 TP_OUT_42.2
  other v1: 29.238,29.429 30.762,29.429 23.714,29.619 25.619,29.619 34.382,29.619 36.287,29.619
GND43: C4301.2 C4302.2 C4303.2 C4304.2 C4305.2 C4306.2 C4307.2 C4308.2 TP_IN_43.2 TP_OUT_43.2
  other v1: 44.666,28.095 55.334,28.095 44.094,28.286 45.237,28.286 54.762,28.286 55.905,28.286 46.444,28.476 47.46,28.476 48.476,28.476 49.492,28.476 50.508,28.476 51.524,28.476 52.54,28.476 53.556,28.476 43.713,28.857 45.618,28.857 54.381,28.857 56.286,28.857 46.952,28.984 47.968,28.984 48.984,28.984 50,28.984 51.016,28.984 52.032,28.984 53.048,28.984 43.713,29.619 45.618,29.619 54.381,29.619 56.286,29.619
GND44: C44.2 C46.2 TP_IN_44.2 TP_OUT_44.2 | length 2.8
  L1 w0.15: v1(69.428,28.095) C44.2 ; v1(70.571,28.095) C46.2
GND45: C4501.2 C4502.2 C4503.2 C4504.2 C4505.2 C4506.2 C4507.2 C4508.2 C4509.2 C4510.2 TP_IN_45.2 TP_OUT_45.2
GND51: C51.2 TP_IN_51.2 TP_OUT_51.2
GND52: C5201.2 C5202.2 C5203.2 C5204.2 C5205.2 C5206.2 C5207.2 C5208.2 TP_IN_52.2 TP_OUT_52.2 | length 6.7
  L1 w0.5: v1(26.444,8.667) C5201.2 ; C5202.2 v1(27.46,11.334) ; v1(28.476,8.667) C5203.2 ; C5204.2 v1(29.492,11.334) ; v1(30.508,8.667) C5205.2 ; C5206.2 v1(31.524,11.334) ; v1(32.54,8.667) C5207.2 ; C5208.2 v1(33.556,11.334)
  other v1: 24.666,8.095 35.334,8.095 24.095,8.286 25.238,8.286 34.763,8.286 35.906,8.286 23.714,8.857 25.619,8.857 34.382,8.857 36.287,8.857 23.714,9.619 25.619,9.619 34.382,9.619 36.287,9.619
GND53: C5301.2 C5302.2 C5303.2 C5304.2 C5305.2 C5306.2 C5307.2 C5308.2 TP_IN_53.2 TP_OUT_53.2
  other v1: 44.666,8.095 55.334,8.095 44.094,8.286 45.237,8.286 54.762,8.286 55.905,8.286 46.444,8.476 47.46,8.476 48.476,8.476 49.492,8.476 50.508,8.476 51.524,8.476 52.54,8.476 53.556,8.476 43.713,8.857 45.618,8.857 54.381,8.857 56.286,8.857 46.952,8.984 47.968,8.984 48.984,8.984 50,8.984 51.016,8.984 52.032,8.984 53.048,8.984 43.713,9.619 45.618,9.619 54.381,9.619 56.286,9.619
GND54: C54.2 TP_IN_54.2 TP_OUT_54.2 | length 0.6
  L1 w0.5: v1(63.332,14.763) C54.2
GND55: C55.2 TP_IN_55.2 TP_OUT_55.2 | length 0.8
  L1 w0.5: v1(90,8.667) C55.2

## Polygon pours and split planes (outlines as drawn)
+VCC43 on L2 "+VCC43_L02_P143" (solid, pour order 143): 42,30.254 58,30.254 58,38 42,38
GND51 on L2 "GND51_L02_P048" (solid, pour order 48): 2,18 18,18 18,2 2,2
GND52 on L2 "GND52_L02_P046" (solid, pour order 46): 22,18 38,18 38,2 22,2
GND53 on L2 "GND53_L02_P044" (solid, pour order 44): 42,18 58,18 58,2 42,2
GND54 on L2 "GND54_L02_P042" (solid, pour order 42): 62,18 78,18 78,2 62,2
GND55 on L2 "GND55_L02_P040" (solid, pour order 40): 82,18 98,18 98,2 82,2
GND45 on L2 "GND45_L02_P038" (solid, pour order 38): 82,38 98,38 98,22 82,22
GND43 on L2 "GND43_L02_P034" (solid, pour order 34): 42,29.746 58,29.746 58,22 42,22
GND42 on L2 "GND42_L02_P032" (solid, pour order 32): 22,38 38,38 38,22 22,22
GND41 on L2 "GND41_L02_P030" (solid, pour order 30): 2,38 18,38 18,22 2,22
GND35 on L2 "GND35_L02_P028" (solid, pour order 28): 82,58 98,58 98,42 82,42
GND34 on L2 "GND34_L02_P026" (solid, pour order 26): 62,58 78,58 78,42 62,42
GND33 on L2 "GND33_L02_P024" (solid, pour order 24): 42,58 58,58 58,42 42,42
GND32 on L2 "GND32_L02_P022" (solid, pour order 22): 22,58 38,58 38,42 22,42
GND31 on L2 "GND31_L02_P020" (solid, pour order 20): 2,58 18,58 18,42 2,42
GND23 on L2 "GND23_L02_P014" (solid, pour order 14): 42,78 58,78 58,62 42,62
GND22 on L2 "GND22_L02_P012" (solid, pour order 12): 22,78 38,78 38,62 22,62
GND21 on L2 "GND21_L02_P010" (solid, pour order 10): 2,78 18,78 18,62 2,62
GND15 on L2 "GND15_L02_P008" (solid, pour order 8): 82,98 98,98 98,82 82,82
GND13 on L2 "GND13_L02_P004" (solid, pour order 4): 42,98 58,98 58,82 42,82
GND12 on L2 "GND12_L02_P002" (solid, pour order 2): 22,98 38,98 38,82 22,82
GND11 on L2 "GND11_L02_P000" (solid, pour order 0): 2,98 18,98 18,82 2,82
GND44 on L2 "GND44_L02_P036" (solid, pour order 36): 62,38 78,38 78,22 62,22
GND25 on L2 "GND25_L02_P018" (solid, pour order 18): 82,78 98,78 98,62 82,62
GND24 on L2 "GND24_L02_P016" (solid, pour order 16): 62,78 78,78 78,62 62,62
GND14 on L2 "GND14_L02_P006" (solid, pour order 6): 62,98 78,98 78,82 62,82
GND43 on L3 "GND43_L03_P144" (solid, pour order 144): 42,22 58,22 58,29.746 42,29.746
+VCC51 on L3 "+VCC51_L03_P049" (solid, pour order 49): 2,18 18,18 18,2 2,2
+VCC52 on L3 "+VCC52_L03_P047" (solid, pour order 47): 22,18 38,18 38,2 22,2
+VCC53 on L3 "+VCC53_L03_P045" (solid, pour order 45): 42,18 58,18 58,2 42,2
+VCC54 on L3 "+VCC54_L03_P043" (solid, pour order 43): 62,18 78,18 78,2 62,2
+VCC55 on L3 "+VCC55_L03_P041" (solid, pour order 41): 82,18 98,18 98,2 82,2
+VCC45 on L3 "+VCC45_L03_P039" (solid, pour order 39): 82,38 98,38 98,22 82,22
+VCC43 on L3 "+VCC43_L03_P035" (solid, pour order 35): 42,38 58,38 58,30.254 42,30.254
+VCC42 on L3 "+VCC42_L03_P033" (solid, pour order 33): 22,38 38,38 38,22 22,22
+VCC41 on L3 "+VCC41_L03_P031" (solid, pour order 31): 2,38 18,38 18,22 2,22
+VCC35 on L3 "+VCC35_L03_P029" (solid, pour order 29): 82,58 98,58 98,42 82,42
+VCC34 on L3 "+VCC34_L03_P027" (solid, pour order 27): 62,58 78,58 78,42 62,42
+VCC33 on L3 "+VCC33_L03_P025" (solid, pour order 25): 42,58 58,58 58,42 42,42
+VCC32 on L3 "+VCC32_L03_P023" (solid, pour order 23): 22,58 38,58 38,42 22,42
+VCC31 on L3 "+VCC31_L03_P021" (solid, pour order 21): 2,58 18,58 18,42 2,42
+VCC23 on L3 "+VCC23_L03_P015" (solid, pour order 15): 42,78 58,78 58,62 42,62
+VCC22 on L3 "+VCC22_L03_P013" (solid, pour order 13): 22,78 38,78 38,62 22,62
+VCC21 on L3 "+VCC21_L03_P011" (solid, pour order 11): 2,78 18,78 18,62 2,62
+VCC15 on L3 "+VCC15_L03_P009" (solid, pour order 9): 82,98 98,98 98,82 82,82
+VCC13 on L3 "+VCC13_L03_P005" (solid, pour order 5): 42,98 58,98 58,82 42,82
+VCC12 on L3 "+VCC12_L03_P003" (solid, pour order 3): 22,98 38,98 38,82 22,82
+VCC11 on L3 "+VCC11_L03_P001" (solid, pour order 1): 2,98 18,98 18,82 2,82
+VCC44 on L3 "+VCC44_L03_P037" (solid, pour order 37): 62,38 78,38 78,22 62,22
+VCC25 on L3 "+VCC25_L03_P019" (solid, pour order 19): 82,78 98,78 98,62 82,62
+VCC24 on L3 "+VCC24_L03_P017" (solid, pour order 17): 62,78 78,78 78,62 62,62
+VCC14 on L3 "+VCC14_L03_P007" (solid, pour order 7): 62,98 78,98 78,82 62,82
GND43 on L1 "GND43_L01_P142" (solid, pour order 142): 46.19,29.81 46.19,28.095 53.81,28.095 53.81,29.81
+VCC43 on L1 "+VCC43_L01_P141" (solid, pour order 141): 46.19,30.191 46.19,31.905 53.81,31.905 53.81,30.191
GND53 on L1 "GND53_L01_P140" (solid, pour order 140): 54,9.81 56.667,9.81 56.667,7.714 54,7.714
+VCC53 on L1 "+VCC53_L01_P139" (solid, pour order 139): 54,10.191 56.667,10.191 56.667,12.286 54,12.286
GND53 on L1 "GND53_L01_P138" (solid, pour order 138): 43.332,9.81 45.999,9.81 45.999,7.714 43.332,7.714
+VCC53 on L1 "+VCC53_L01_P137" (solid, pour order 137): 43.332,10.191 45.999,10.191 45.999,12.286 43.332,12.286
GND52 on L1 "GND52_L01_P136" (solid, pour order 136): 34.001,9.81 36.668,9.81 36.668,7.714 34.001,7.714
+VCC52 on L1 "+VCC52_L01_P135" (solid, pour order 135): 34.001,10.191 36.668,10.191 36.668,12.286 34.001,12.286
GND52 on L1 "GND52_L01_P134" (solid, pour order 134): 23.333,9.81 26,9.81 26,7.714 23.333,7.714
+VCC52 on L1 "+VCC52_L01_P133" (solid, pour order 133): 23.333,10.191 26,10.191 26,12.286 23.333,12.286
GND25 on L1 "GND25_L01_P132" (solid, pour order 132): 82.38,69.809 82.38,62.38 97.62,62.38 97.62,69.809
+VCC25 on L1 "+VCC25_L01_P131" (solid, pour order 131): 82.38,70.19 82.38,77.62 97.62,77.62 97.62,70.19
GND35 on L1 "GND35_L01_P130" (solid, pour order 130): 82.38,49.809 82.38,42.38 97.62,42.38 97.62,49.809
+VCC35 on L1 "+VCC35_L01_P129" (solid, pour order 129): 82.38,50.19 82.38,57.62 97.62,57.62 97.62,50.19
GND53 on L1 "GND53_L01_P126" (solid, pour order 126): 46.19,9.81 46.19,8.095 53.81,8.095 53.81,9.81
+VCC53 on L1 "+VCC53_L01_P125" (solid, pour order 125): 46.19,10.191 46.19,11.905 53.81,11.905 53.81,10.191
GND51 on L1 "GND51_L01_P122" (solid, pour order 122): 15.906,9.81 15.906,8.095 4.095,8.095 4.095,9.81
+VCC51 on L1 "+VCC51_L01_P120" (solid, pour order 120): 4.095,10.191 4.095,11.905 15.906,11.905 15.906,10.191
GND43 on L1 "GND43_L01_P119" (solid, pour order 119): 54,29.81 56.667,29.81 56.667,27.714 54,27.714
+VCC43 on L1 "+VCC43_L01_P118" (solid, pour order 118): 54,30.191 56.667,30.191 56.667,32.286 54,32.286
GND43 on L1 "GND43_L01_P117" (solid, pour order 117): 43.332,29.81 45.999,29.81 45.999,27.714 43.332,27.714
+VCC43 on L1 "+VCC43_L01_P116" (solid, pour order 116): 43.332,30.191 45.999,30.191 45.999,32.286 43.332,32.286
GND33 on L1 "GND33_L01_P115" (solid, pour order 115): 54.191,46.952 45.809,46.952 45.809,46.19 54.191,46.19
+VCC33 on L1 "+VCC33_L01_P114" (solid, pour order 114): 54.191,47.333 45.809,47.333 45.809,48.285 54.191,48.285
GND33 on L1 "GND33_L01_P109" (solid, pour order 109): 54.191,52.667 45.809,52.667 45.809,51.905 54.191,51.905
GND33 on L1 "GND33_L01_P108" (solid, pour order 108): 43.332,49.809 45.999,49.809 45.999,48.666 43.332,48.666
+VCC33 on L1 "+VCC33_L01_P107" (solid, pour order 107): 43.332,50.19 45.999,50.19 45.999,51.333 43.332,51.333
GND33 on L1 "GND33_L01_P106" (solid, pour order 106): 54,49.809 56.667,49.809 56.667,48.666 54,48.666
+VCC33 on L1 "+VCC33_L01_P105" (solid, pour order 105): 54,50.19 56.667,50.19 56.667,51.333 54,51.333
+VCC33 on L1 "+VCC33_L01_P103" (solid, pour order 103): 54.191,53.048 45.809,53.048 45.809,53.81 54.191,53.81
GND42 on L1 "GND42_L01_P090" (solid, pour order 90): 23.333,29.81 26,29.81 26,28.667 23.333,28.667
+VCC42 on L1 "+VCC42_L01_P089" (solid, pour order 89): 23.333,30.191 26,30.191 26,31.334 23.333,31.334
GND42 on L1 "GND42_L01_P088" (solid, pour order 88): 34.001,29.81 36.668,29.81 36.668,28.667 34.001,28.667
+VCC42 on L1 "+VCC42_L01_P087" (solid, pour order 87): 34.001,30.191 36.668,30.191 36.668,31.334 34.001,31.334
GND42 on L1 "GND42_L01_P086" (solid, pour order 86): 31.333,29.809 28.667,29.809 28.666,29.048 31.333,29.048
+VCC42 on L1 "+VCC42_L01_P085" (solid, pour order 85): 31.333,30.19 28.666,30.19 28.666,30.953 31.333,30.953
GND32 on L1 "GND32_L01_P084" (solid, pour order 84): 23.333,49.809 26,49.809 26,47.714 23.333,47.714
+VCC32 on L1 "+VCC32_L01_P083" (solid, pour order 83): 23.333,50.19 26,50.19 26,52.286 23.333,52.286
GND32 on L1 "GND32_L01_P082" (solid, pour order 82): 34.001,49.809 36.668,49.809 36.668,47.714 34.001,47.714
+VCC32 on L1 "+VCC32_L01_P081" (solid, pour order 81): 34.001,50.19 36.668,50.19 36.668,52.286 34.001,52.286
GND32 on L1 "GND32_L01_P080" (solid, pour order 80): 31.333,49.809 28.667,49.809 28.666,48.095 31.333,48.095
+VCC32 on L1 "+VCC32_L01_P079" (solid, pour order 79): 31.333,50.19 28.666,50.19 28.666,51.905 31.333,51.905
GND23 on L1 "GND23_L01_P078" (solid, pour order 78): 43.332,69.809 45.999,69.809 45.999,67.714 43.332,67.714
+VCC23 on L1 "+VCC23_L01_P077" (solid, pour order 77): 43.332,70.19 45.999,70.19 45.999,72.286 43.332,72.286
GND23 on L1 "GND23_L01_P076" (solid, pour order 76): 54,69.809 56.667,69.809 56.667,67.714 54,67.714
+VCC23 on L1 "+VCC23_L01_P075" (solid, pour order 75): 54,70.19 56.667,70.19 56.667,72.286 54,72.286
GND22 on L1 "GND22_L01_P074" (solid, pour order 74): 23.333,69.809 26,69.809 26,67.714 23.333,67.714
+VCC22 on L1 "+VCC22_L01_P073" (solid, pour order 73): 23.333,70.19 26,70.19 26,72.286 23.333,72.286
GND22 on L1 "GND22_L01_P072" (solid, pour order 72): 34.001,69.809 36.668,69.809 36.668,67.714 34.001,67.714
+VCC22 on L1 "+VCC22_L01_P071" (solid, pour order 71): 34.001,70.19 36.668,70.19 36.668,72.286 34.001,72.286
GND34 on L1 "GND34_L01_P056" (solid, pour order 56): 71.333,49.809 68.666,49.809 68.666,48.095 71.333,48.095
+VCC34 on L1 "+VCC34_L01_P055" (solid, pour order 55): 71.333,50.19 68.666,50.19 68.666,51.905 71.333,51.905
GND45 on L4 "GND45_L04_P128" (solid, pour order 128): 82.38,29.81 82.38,22.38 97.62,22.38 97.62,29.81
+VCC45 on L4 "+VCC45_L04_P127" (solid, pour order 127): 82.38,30.191 82.38,37.62 97.62,37.62 97.62,30.191
GND43 on L4 "GND43_L04_P146" (solid, pour order 146): 42,22 58,22 58,29.746 42,29.746
+VCC43 on L4 "+VCC43_L04_P145" (solid, pour order 145): 42,38 58,38 58,30.254 42,30.254

## Other copper
L1:
  text "Designed by FEDEVEL Academy" at 29.814,59.386 h1.52
  text "Simulated and Measured by PICOTEST" at 24.862,39.548 h1.52

## Silkscreen, mask and mechanical layers (free items; w line width, h text height)
Top Overlay:
  text "11" at 9.111,95.931 h1.52
  text "15" at 88.857,95.931 h1.52
  text "12" at 28.857,95.906 h1.52
  text "14" at 68.857,95.898 h1.52
  text "13" at 48.885,95.863 h1.52
  text "21" at 8.984,75.931 h1.52
  text "22" at 28.73,75.931 h1.52
  text "24" at 68.73,75.931 h1.52
  text "25" at 88.73,75.931 h1.52
  text "23" at 48.73,75.906 h1.52
  text "10x 100nF" at 46.632,69.67 h0.8
  text "10x 10nF" at 27.049,69.644 h0.8
  text "31" at 8.984,55.931 h1.52
  text "32" at 28.73,55.931 h1.52
  text "34" at 68.73,55.931 h1.52
  text "35" at 88.73,55.931 h1.52
  text "33" at 48.73,55.817 h1.52
  text "41" at 8.984,35.931 h1.52
  text "42" at 28.73,35.931 h1.52
  text "44" at 68.73,35.931 h1.52
  text "45" at 88.73,35.931 h1.52
  text "43" at 48.73,35.906 h1.52
  text "51" at 8.984,15.931 h1.52
  text "52" at 28.73,15.931 h1.52
  text "53" at 48.73,15.931 h1.52
  text "54" at 68.73,15.931 h1.52
  text "55" at 88.73,15.931 h1.52